# Altium PCB analog_osc.PcbDoc (part 1 of 2)
Units mm, origin at the board's own origin, x right, y up, seen from the top; angles counter-clockwise.
Board outline 145 x 85 mm, 4 copper layers (Top Layer, GND, Mid-Layer 1, Bottom Layer); 292 components, 196 nets, 993 pads, 506 vias.
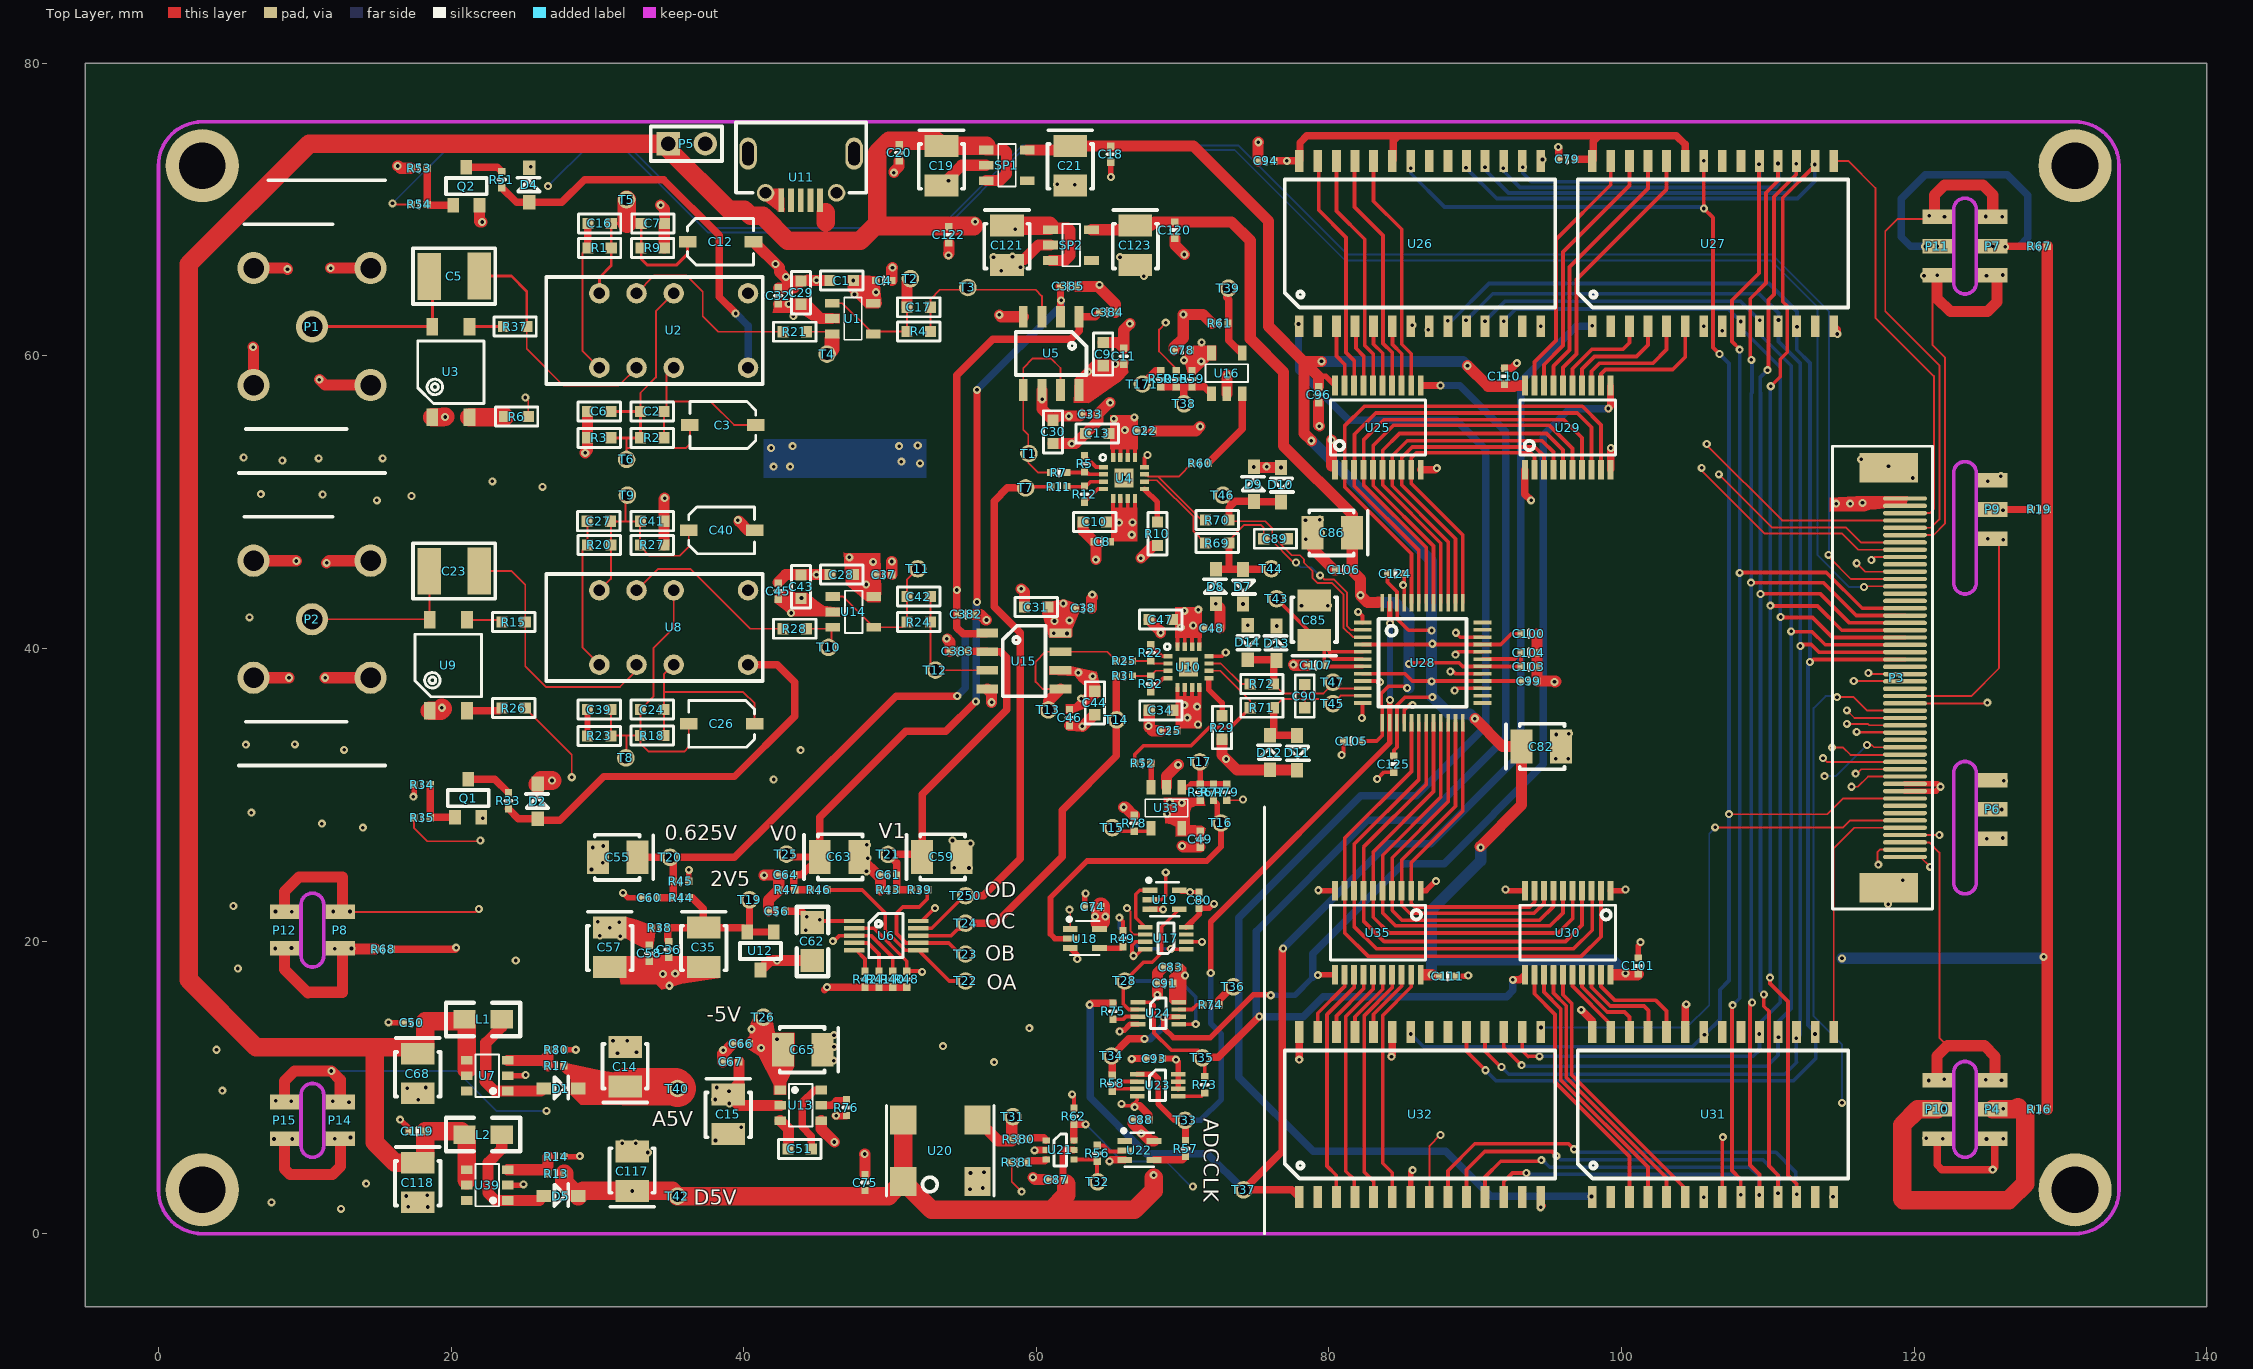
[diagram p0: Top Layer view]
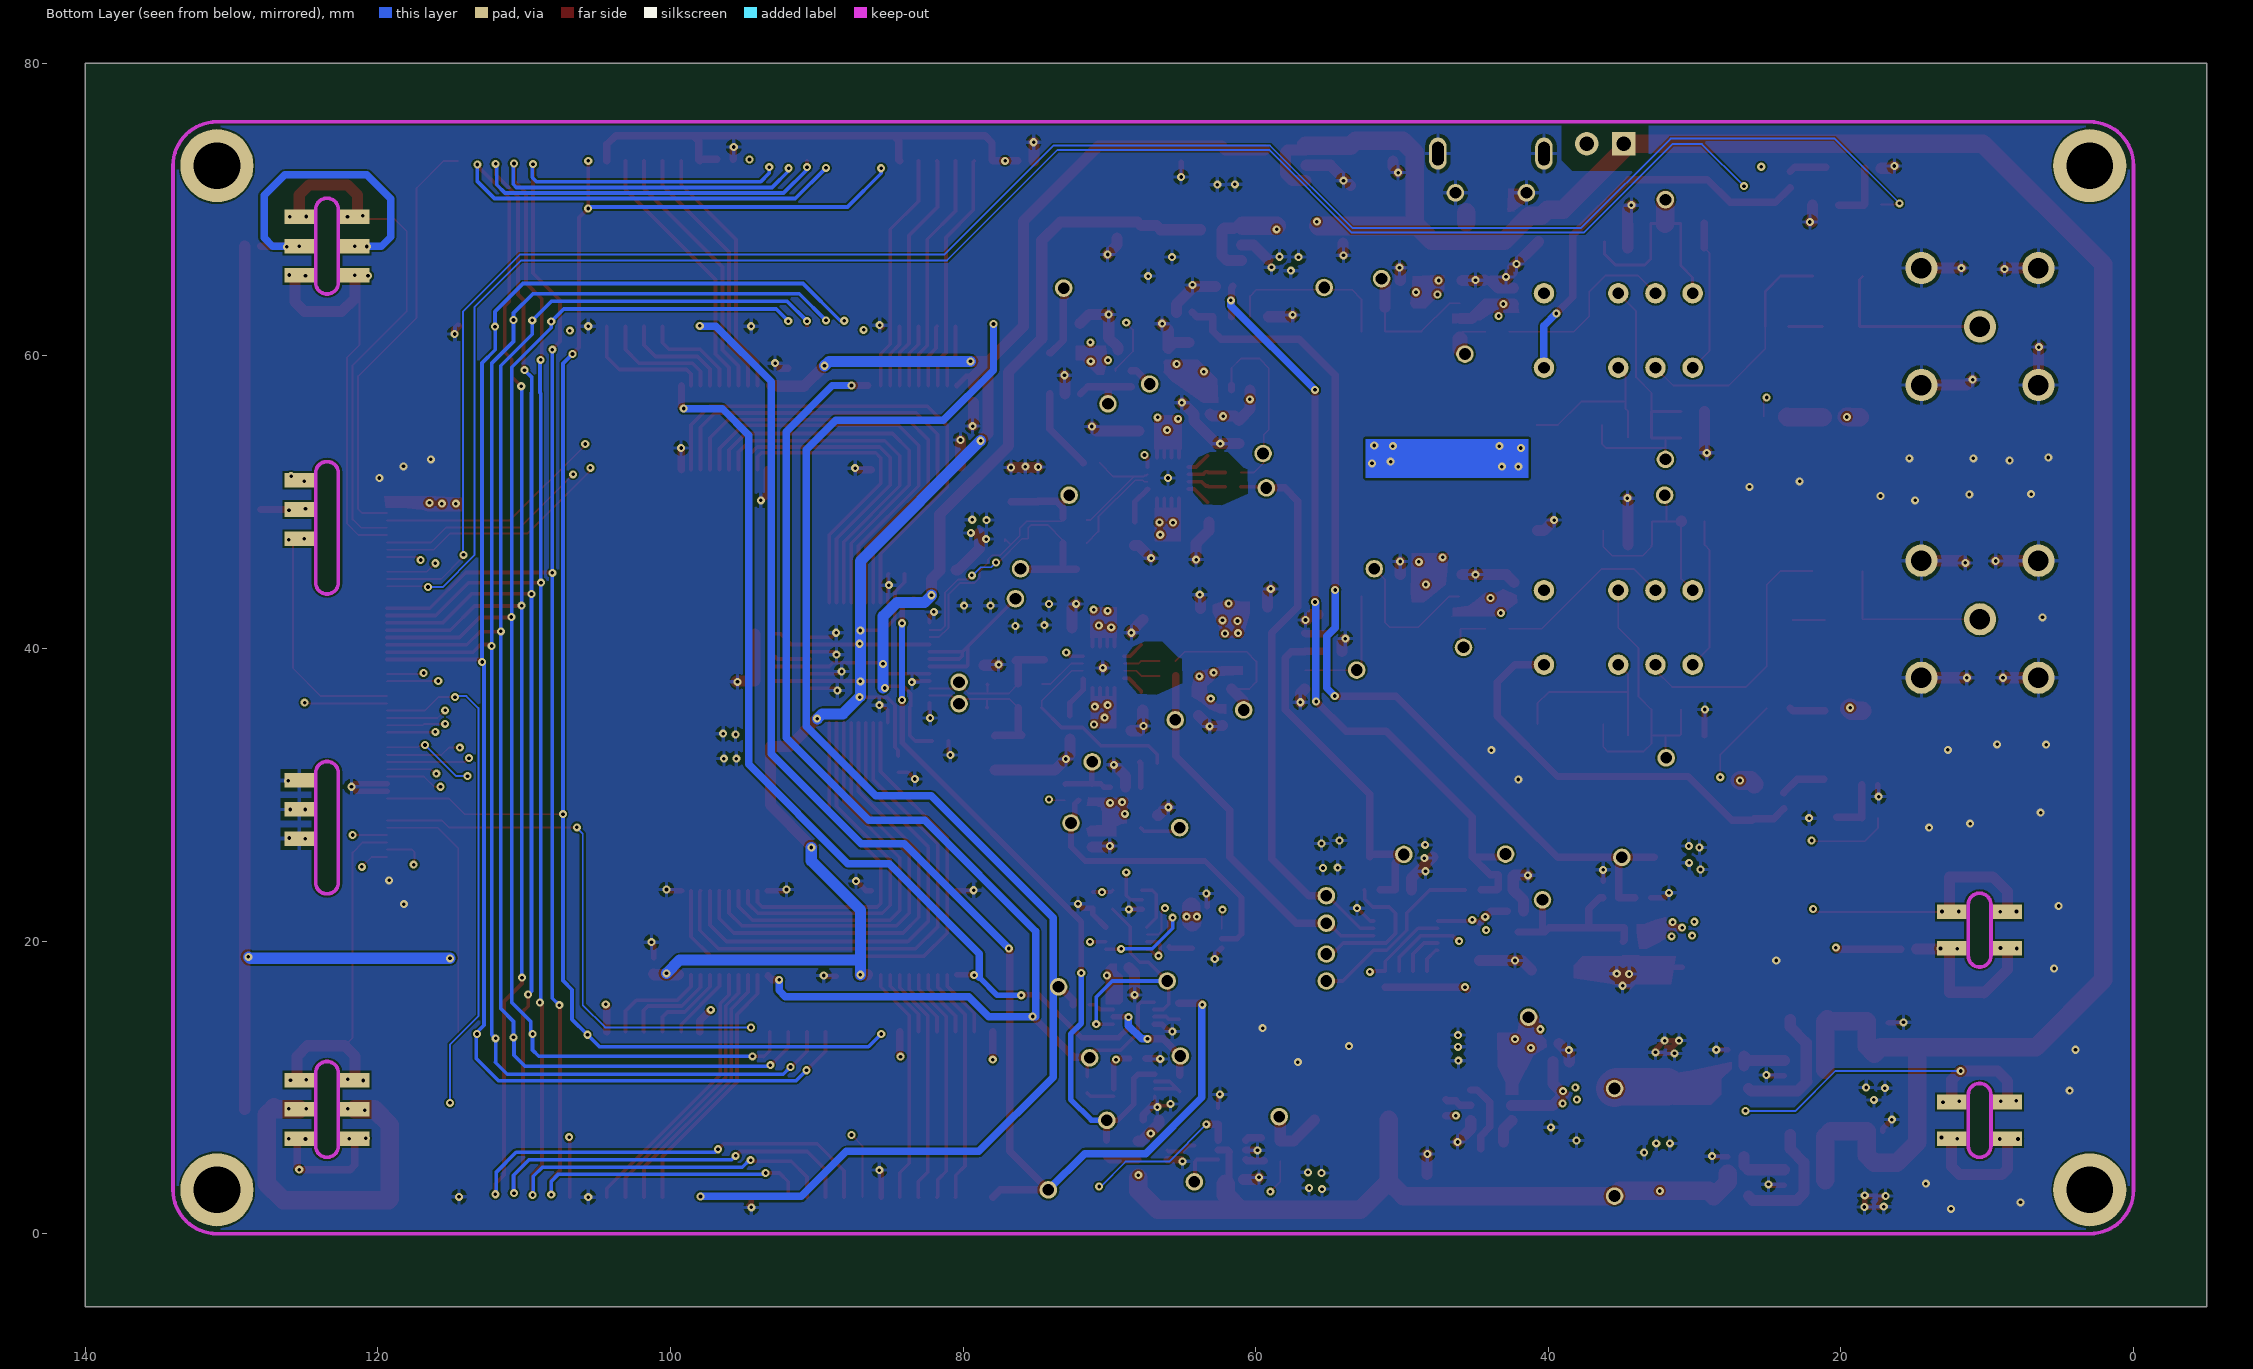
[diagram p1: Bottom Layer view, seen from below]
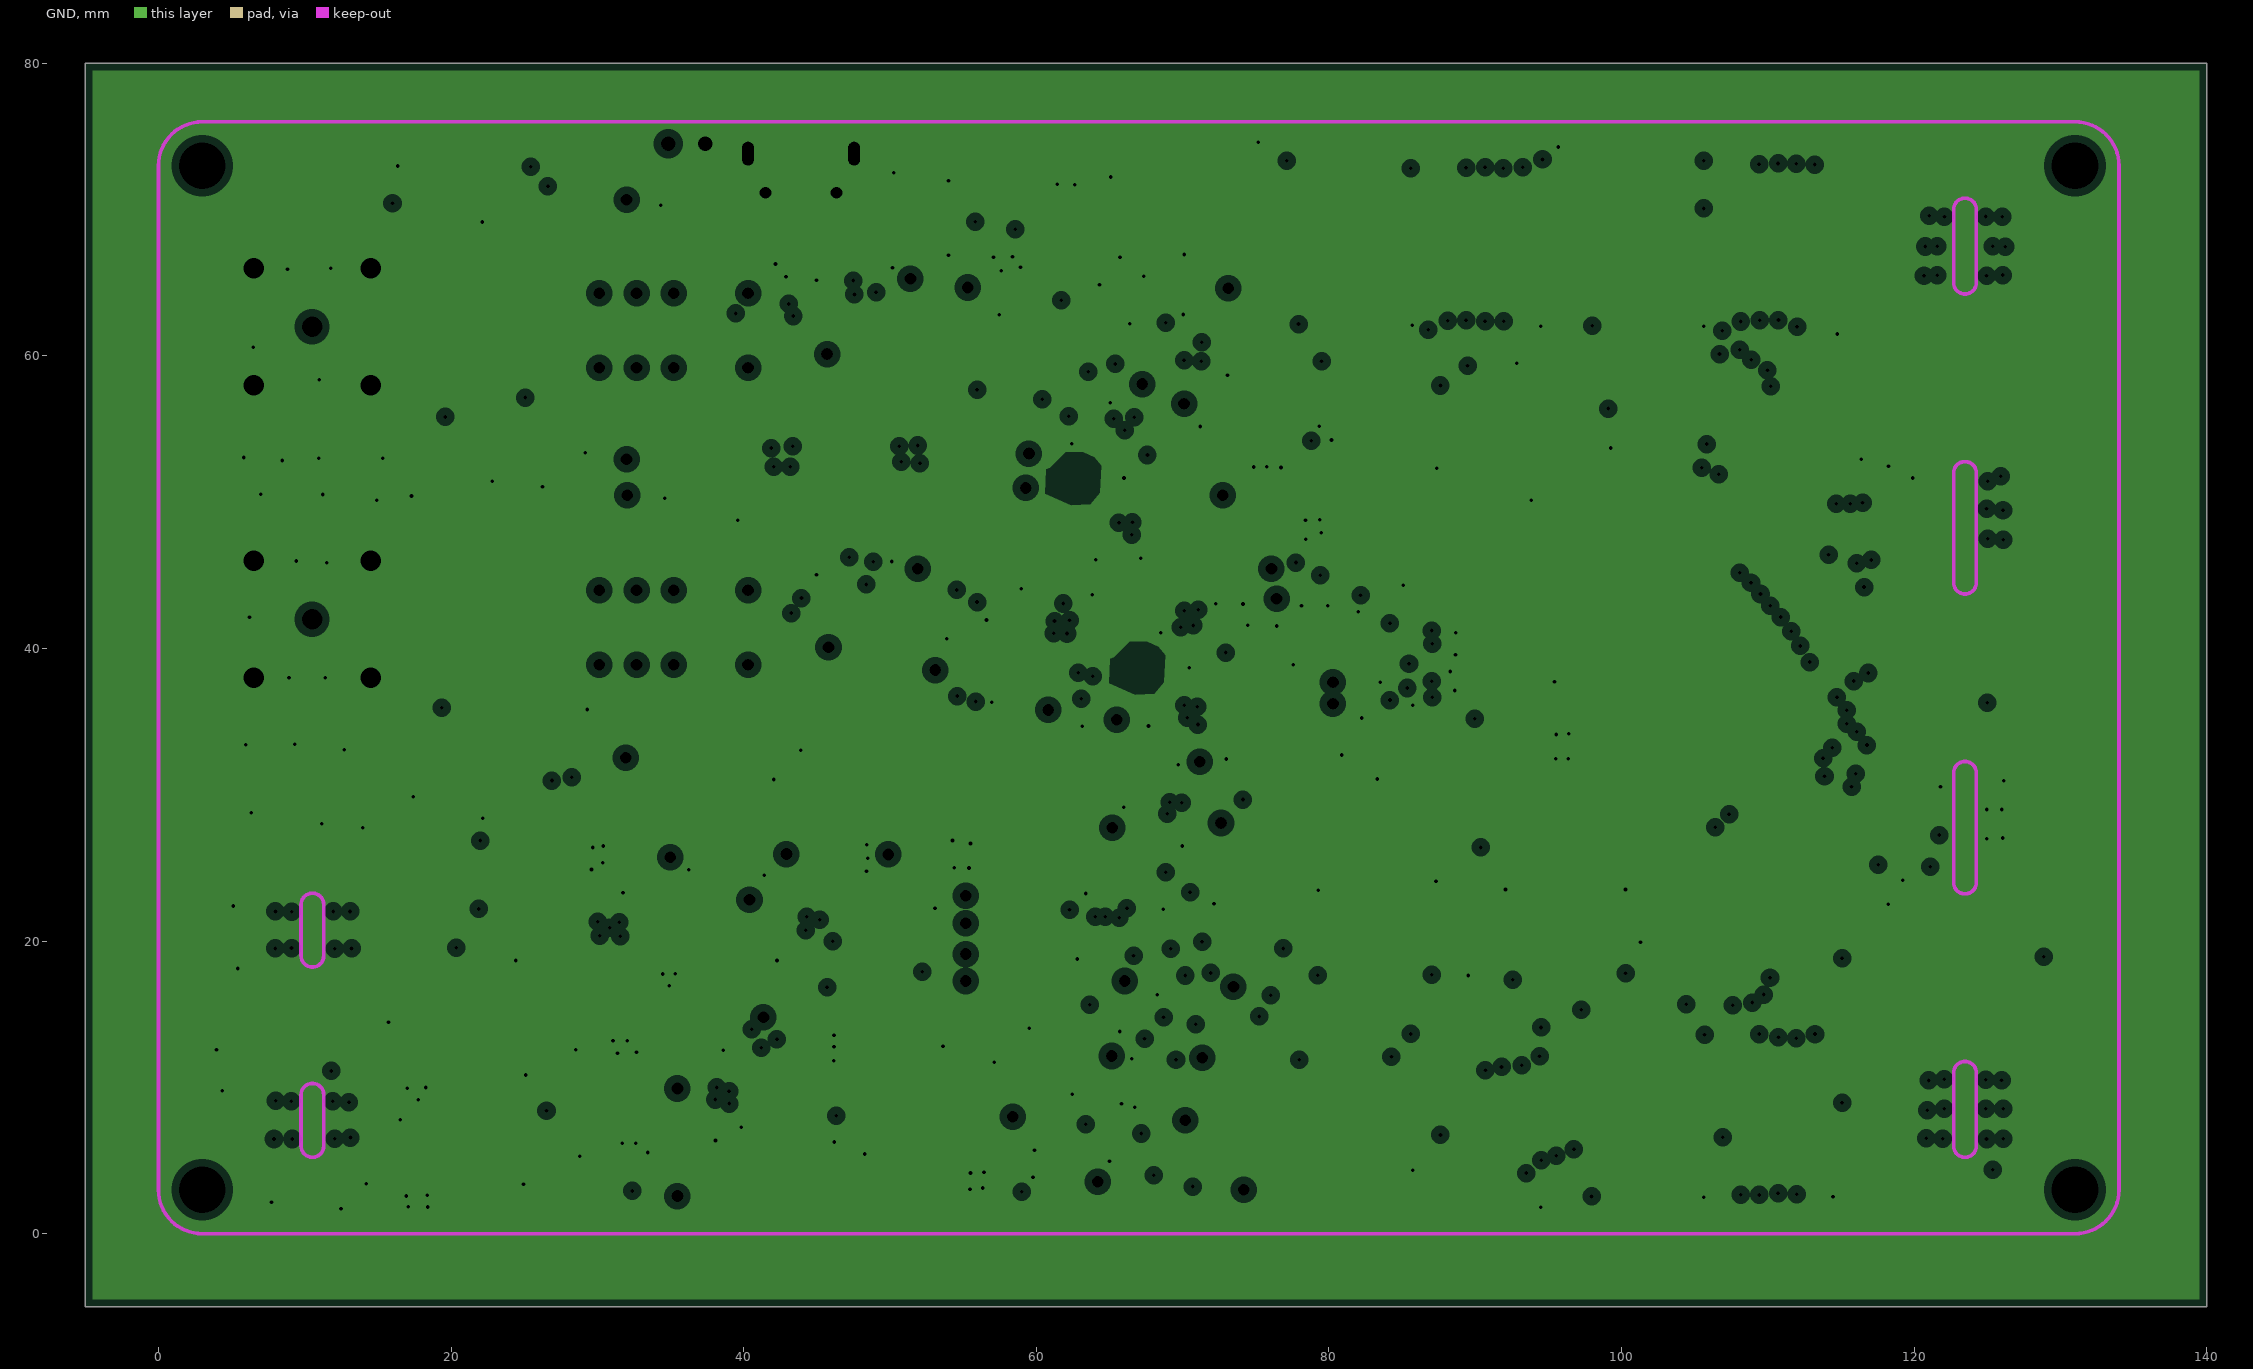
[diagram p2: GND, clearances drawn from the general rule]
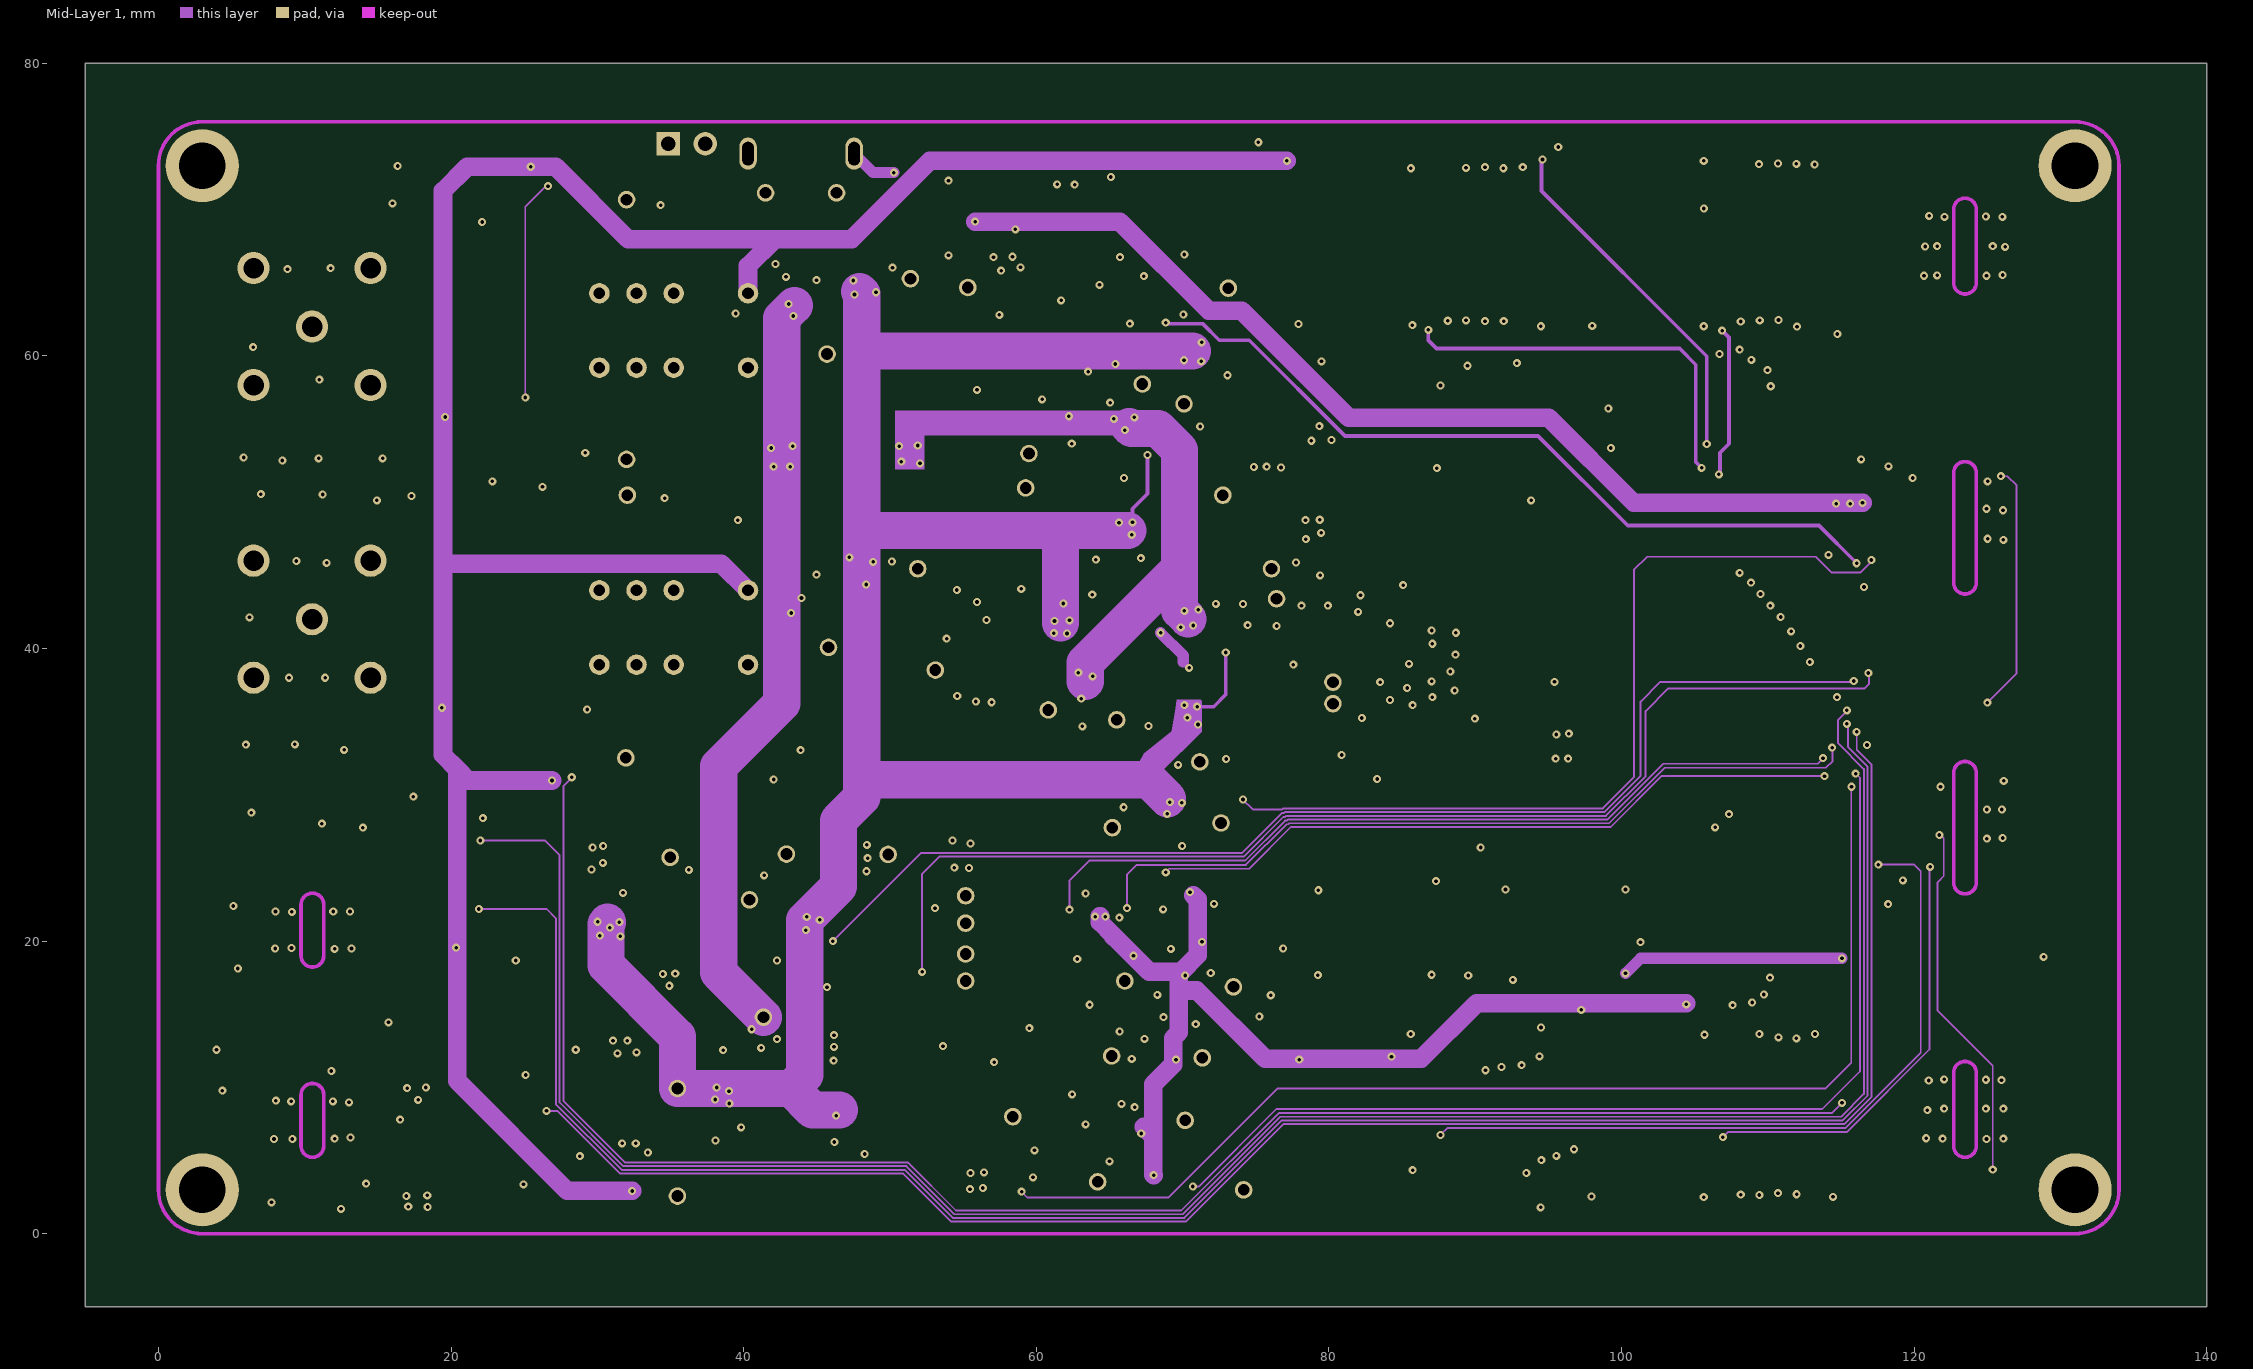
[diagram p3: Mid-Layer 1]

## Layer stack, top to bottom
Top Layer: signal copper 0.0356
Dielectric: core 0.32, FR-4, Dk 4.8
GND: plane copper 0.0356, net DGND
Dielectric: prepreg 0.32, FR-4, Dk 4.8
Mid-Layer 1: signal copper 0.0356
Dielectric: core 0.32, FR-4, Dk 4.8
Bottom Layer: signal copper 0.0356

## Board outline
-5,80 140,80 140,-5 -5,-5

## Design rules (kind name [scope] priority, off if disabled: settings)
Clearance [All] p1: gap=0.127
ComponentClearance [All] p1 off: gap=0.254 collisioncheckmode=3 verticalgap=0.254 showdistances=FALSE
Height [All] p1 off: minheight=0 maxheight=25.4 prefheight=12.7
HoleSize [All] p1: absolutevalues=TRUE maxlimit=6 minlimit=0.2 maxpercent=80.000 minpercent=20.000
HoleToHoleClearance [All] p1: gap=0.025 allowstackedmicrovias=TRUE
MinimumSolderMaskSliver [All] p1: minsoldermaskwidth=0.025
PlaneClearance [All] p1: clearance=0.508
PlaneConnect [All] p1: planeconnectstyle=Relief reliefexpansion=0.508 reliefentries=4 reliefconductorwidth=0.254 reliefairgap=0.254
PolygonConnect [All] p1: connectstyle=Relief reliefconductorwidth=0.254 reliefentries=4 polygonreliefangle="90 Angle" airgapwidth=0.254
RoutingVias [All] p1: holewidth=0.25 width=0.55 viastyle="Through Hole" minholewidth=0.25 minwidth=0.55 maxholewidth=8 maxwidth=6
SilkToSilkClearance [All] p1: silktosilkclearance=0
SilkToSolderMaskClearance [IsPad] p1: minsilkscreentomaskgap=0 clearancetoexposedcopper=TRUE
SolderMaskExpansion [All] p1: expansion=0.102
Width [All] p1: maxlimit=25.4 minlimit=0.127 preferedwidth=0.254 toplayer_prefwidth=0.127 bottomlayer_prefwidth=0.127 minimp=50.000000 maximp=50.000000 favimp=50.000000
19 further rules are at their usual default settings.

## Classes and differential pairs
component class digtal: C14 C15 C18 C19 C20 C21 C49 C50 C51 C65 C66 C67 C68 C74 C75 C78 C80 C83 C87 C88 C91 C93 C117 C118 C119 C120 C121 C122 C123 D1 D5 L1 L2 P3 P5 R13 R14 R17 R36 R49 R50 R52 R55 R56 R57 R58 R59 R60 R61 R62 R73 R74 R75 R76 R77 R78 R79 R80 R380 R381 SP1 SP2 T15 T16 T17 T26 T28 T31 T32 T33 T34 T35 T36 T37 T38 T39 T40 T42 T171 U7 U11 U13 U16 U17 U18 U19 U20 U21 U22 U23 U24 U33 U39
component class adc: C79 C82 C85 C86 C89 C90 C94 C96 C99 C100 C101 C103 C104 C105 C106 C107 C110 C111 C124 C125 D7 D8 D9 D10 D11 D12 D13 D14 P4 P6 P7 P8 P9 P10 P11 P12 P14 P15 R16 R19 R67 R68 R69 R70 R71 R72 T43 T44 T45 T46 T47 U25 U26 U27 U28 U29 U30 U31 U32 U35
component class analog_osc: C1 C2 C3 C4 C5 C6 C7 C8 C9 C10 C11 C12 C13 C16 C17 C22 C23 C24 C25 C26 C27 C28 C29 C30 C31 C32 C33 C34 C35 C36 C37 C38 C39 C40 C41 C42 C43 C44 C45 C46 C47 C48 C55 C56 C57 C58 C59 C60 C61 C62 C63 C64 C382 C383 C384 C385 D2 D4 P1 P2 Q1 Q2 R1 R2 R3 R4 R5 R6 R7 R9 R10 R11 R12 R15 R18 R20 R21 R22 R23 R24 R25 R26 R27 R28 R29 R31 R32 R33 R34 R35 R37 R38 R39 R40 R41 R42 R43 R44 R45 R46 R47 R48 R51 R53 R54 T1 T2 T3 T4 T5 T6 T7 T8 T9 T10 T11 T12 T13 T14 T19 T20 T21 T22 T23 T24 T25 T250 U1 U2 U3 U4 U5 U6 U8 U9 U10 U12 U14 U15

## Components (designator, comment, footprint, x,y, rotation, side; value= is the part's Value field where it differs from the comment)
C1 "22UF" 0603C 47.5,65.15 r180 top
C2 "15PF" 0603C 34.55,56.2 r180 top
C3 "V_CAP" V-CAP 36.325,53.675 r0 top
C4 "C104" 0402 49.025,65.15 r0 top
C5 "1UF" 1812 18.525,65.425 r0 top
C6 "360P" 0603C 30.925,56.2 r180 top
C7 "18P" 0603C 33,69.05 r0 top
C8 "C104" 0402 63.95,47.3 r0 top
C9 "22UF" 0603C 64.575,59.325 r90 top
C10 "22UF" 0603C 64.8,48.65 r180 top
C11 "C104" 0402 65.975,59.425 r90 top
C12 "V_CAP" V-CAP 40.675,69.4 r180 top
C13 "22UF" 0603C 63.375,54.7 r0 top
C14 "100UF" CAP-T-3630 31.9,10.05 r270 top
C15 "100UF" CAP-T-3630 38.95,9.525 r90 top
C16 "390PF" 0603C 29.35,69.05 r0 top
C17 "2PF" 0603C 51.175,63.325 r0 top
C18 "C104" 0402 65.1,74.325 r270 top
C19 "100UF" CAP-T-3630 53.525,74.35 r90 top
C20 "C104" 0402 50.625,74.425 r270 top
C21 "100UF" CAP-T-3630 62.325,74.35 r90 top
C22 "C104" 0402 67.975,54.875 r180 top
C23 "1UF" 1812 18.525,45.275 r0 top
C24 "15PF" 0603C 34.55,35.825 r180 top
C25 "C104" 0402 68.525,34.375 r0 top
C26 "V_CAP" V-CAP 36.25,33.25 r0 top
C27 "390PF" 0603C 29.3,48.7 r0 top
C28 "22UF" 0603C 47.5,45.05 r180 top
C29 "22UF" 0603C 43.925,65.125 r270 top
C30 "22UF" 0603C 61.15,54 r90 top
C31 "22UF" 0603C 60.8,42.825 r180 top
C32 "C104" 0402 42.375,63.55 r90 top
C33 "C104" 0402 63.125,56.025 r0 top
C34 "22UF" 0603C 69.325,35.775 r180 top
C35 "100UF" CAP-T-3630 37.275,20.925 r90 top
C36 "C0.1uF" 0402 34.875,19.975 r270 top
C37 "C104" 0402 49.025,45.05 r0 top
C38 "C104" 0402 62.675,42.75 r0 top
C39 "360P" 0603C 30.925,35.825 r180 top
C40 "V_CAP" V-CAP 40.75,49.675 r180 top
C41 "18P" 0603C 32.95,48.7 r0 top
C42 "2PF" 0603C 51.175,43.55 r0 top
C43 "22UF" 0603C 43.925,45.025 r270 top
C44 "22UF" 0603C 64,35.475 r90 top
C45 "C104" 0402 42.375,43.375 r90 top
C46 "C104" 0402 62.275,35.825 r270 top
C47 "22UF" 0603C 67.7,41.975 r0 top
C48 "C104" 0402 72.55,41.4 r180 top
C49 "C104" 0402 71.2,27.525 r270 top
C50 "C104" 0402 17.85,14.425 r180 top
C51 "3.3UF" 0603C 44.625,5.8 r180 top
C55 "100UF" CAP-T-3630 32.75,25.725 r0 top
C56 "C0.1uF" 0402 42.8,22.05 r180 top
C57 "100UF" CAP-T-3630 30.85,20.925 r90 top
C58 "C0.1uF" 0402 33.55,19.725 r270 top
C59 "100UF" CAP-T-3630 52.2,25.75 r180 top
C60 "C0.1uF" 0402 33,22.975 r0 top
C61 "C0.1uF" 0402 49.35,24.525 r0 top
C62 "47uF" 1206 44.7,21.275 r270 top
C63 "100UF" CAP-T-3630 45.2,25.75 r180 top
C64 "C0.1uF" 0402 42.325,24.525 r0 top
C65 "100UF" CAP-T-3630 45.4,12.575 r0 top
C66 "C104" 0402 40.375,13 r180 top
C67 "C104" 0402 39.675,11.75 r180 top
C68 "100UF" CAP-T-3630 17.725,12.3 r90 top
C74 "C104" 0402 64.4,22.35 r180 top
C75 "C104" 0402 48.3,2.95 r90 top
C78 "C104" 0402 70.525,60.4 r180 top
C79 "C104" 0402 96.825,73.425 r180 top
C80 "C104" 0402 71.125,23.35 r270 top
C82 "100UF" CAP-T-3630 93.175,33.3 r180 top
C83 "C104" 0402 69.75,18.2 r180 top
C85 "100UF" CAP-T-3630 79,40.575 r270 top
C86 "100UF" CAP-T-3630 81.575,47.9 r0 top
C87 "C104" 0402 61.925,3.7 r180 top
C88 "C104" 0402 66.6,7.775 r0 top
C89 "2PF" 0603C 75.55,47.5 r0 top
C90 "2PF" 0603C 78.35,35.95 r90 top
C91 "C104" 0402 69.325,17.125 r180 top
C93 "C104" 0402 68.625,11.975 r180 top
C94 "C104" 0402 76.25,73.325 r180 top
C96 "C104" 0402 79.3,57.9 r270 top
C99 "C104" 0402 93.125,37.775 r0 top
C100 "C104" 0402 93.125,41 r0 top
C101 "C104" 0402 101.15,17.75 r90 top
C103 "C104" 0402 93.125,38.742 r0 top
C104 "C104" 0402 93.125,39.708 r0 top
C105 "C104" 0402 82.1,33.675 r180 top
C106 "C104" 0402 81.575,45.375 r180 top
C107 "C104" 0402 79.675,38.85 r180 top
C110 "C104" 0402 92,58.05 r90 top
C111 "C104" 0402 87.575,17.6 r0 top
C117 "100UF" CAP-T-3630 32.375,2.925 r270 top
C118 "100UF" CAP-T-3630 17.725,4.85 r90 top
C119 "C104" 0402 18.25,7 r180 top
C120 "C104" 0402 69.475,69.15 r270 top
C121 "100UF" CAP-T-3630 58,68.9 r90 top
C122 "C104" 0402 54.025,68.825 r270 top
C123 "100UF" CAP-T-3630 66.775,68.9 r90 top
C124 "C104" 0402 84,45.1 r0 top
C125 "C104" 0402 84.425,32.65 r270 top
C382 "C104" 0402 55.75,42.325 r180 top
C383 "C104" 0402 54.1,39.8 r0 top
C384 "C104" 0402 65.425,62.975 r180 top
C385 "C104" 0402 62.75,64.75 r180 top
D1 "1N5918WS" SOD23-322F 26.325,9.95 r180 top
D2 "BAT54WS" LC-SOD-323F 25.925,28.375 r270 top
D4 "BAT54WS" LC-SOD-323F 25.35,70.5 r270 top
D5 "1N5918WS" SOD23-322F 26.325,2.6 r180 top
D7 "KDS4148U" LC-SOD-323F 74.125,45.4 r90 top
D8 "KDS4148U" LC-SOD-323F 72.275,43.05 r270 top
D9 "KDS4148U" LC-SOD-323F 74.875,50.05 r270 top
D10 "KDS4148U" LC-SOD-323F 76.725,52.375 r90 top
D11 "KDS4148U" LC-SOD-323F 77.825,34.05 r90 top
D12 "KDS4148U" LC-SOD-323F 75.975,31.7 r270 top
D13 "KDS4148U" LC-SOD-323F 76.425,39.175 r270 top
D14 "KDS4148U" LC-SOD-323F 74.45,41.6 r90 top
L1 "10uH" 0805 20.925,14.65 r0 top
L2 "10uH" 0805 20.925,6.775 r0 top
P1 "BNC" BNC-OSC 10.5,62 r0 top locked
P2 "BNC" BNC-OSC 10.5,42 r0 top locked
P3 "FPC50-0.5" FPC50-0.5 121,38 r180 top locked
P4 "Header 3" ROTA-3PIN 125.4,8.5 r0 top locked
P5 "Head2" HEAD2 37.375,74.5 r90 top
P6 "Header 3" ROTA-3PIN 125.4,29 r0 top locked
P7 "Header 3" ROTA-3PIN 125.4,67.5 r0 top locked
P8 "Header 2" ROTA-2PIN 12.425,22 r0 top locked
P9 "Header 3" ROTA-3PIN 125.4,49.5 r0 top
P10 "Header 3" ROTA-3PIN 121.6,8.5 r0 top locked
P11 "Header 3" ROTA-3PIN 121.6,67.5 r0 top locked
P12 "Header 2" ROTA-2PIN 8.625,22 r0 top locked
P14 "Header 2" ROTA-2PIN 12.425,9 r0 top locked
P15 "Header 2" ROTA-2PIN 8.625,9 r0 top locked
Q1 "SI2302" SOT-23-3 20.275,28.475 r0 top
Q2 "SI2302" SOT-23-3 20.15,70.3 r0 top
R1 "49.9K" 0603R 29.35,67.375 r0 top
R2 "953K" 0603R 34.55,54.4 r180 top
R3 "47K" 0603R 30.925,54.4 r180 top
R4 "100" 0603R 51.175,61.675 r0 top
R5 "499" 0402 63.3,52.075 r90 top
R6 "240R" 0603R 25.275,55.85 r180 top
R7 "499" 0402 61,52.025 r0 top
R9 "953K" 0603R 32.975,67.375 r0 top
R10 "0" 0603R 68.275,47.05 r90 top
R11 "499" 0402 61,51.05 r0 top
R12 "499" 0402 63.3,51.1 r270 top
R13 "732K" 0402 26.625,4.1 r0 top
R14 "10K" 0402 27.725,5.275 r180 top
R15 "56R" 0603R 23.475,41.8 r0 top
R16 "10K" 0402 129.1,8.5 r180 top
R17 "732K" 0402 26.625,11.475 r0 top
R18 "953K" 0603R 34.55,34.05 r180 top
R19 "10K" 0402 129.1,49.5 r180 top
R20 "49.9K" 0603R 29.325,47.075 r0 top
R21 "R100R" 0603R 42.7,61.65 r0 top
R22 "499" 0402 67.825,39.15 r90 top
R23 "47K" 0603R 30.925,34.025 r180 top
R24 "100" 0603R 51.175,41.8 r0 top
R25 "499" 0402 65.475,39.15 r0 top
R26 "240R" 0603R 25.075,35.925 r180 top
R27 "953K" 0603R 32.95,47.075 r0 top
R28 "R100R" 0603R 42.7,41.35 r0 top
R29 "0" 0603R 72.7,33.8 r90 top
R31 "499" 0402 65.475,38.125 r0 top
R32 "499" 0402 67.825,38.125 r270 top
R33 "R100R" 0402 23.925,30.15 r270 top
R34 "R10K" 0402 18.575,30.7 r180 top
R35 "R100R" 0402 18.575,28.425 r180 top
R36 "10K" 0402 71.2,29.625 r90 top
R37 "56R" 0603R 23.575,62 r0 top
R38 "R2K" 0402 33.7,20.9 r0 top
R39 "R2K" 0402 51.475,23.5 r0 top
R40 "R5K" 0402 50.2,16.85 r90 top
R41 "R5K" 0402 49.25,16.85 r90 top
R42 "R5K" 0402 48.3,16.85 r90 top
R43 "R4.99K" 0402 49.35,23.5 r0 top
R44 "R3K" 0402 35.175,22.975 r0 top
R45 "R1K" 0402 36.25,24.1 r180 top
R46 "R2K" 0402 44.575,23.5 r0 top
R47 "R4.99K" 0402 42.4,23.5 r0 top
R48 "R5K" 0402 51.15,17.95 r270 top
R49 "75" 0402 65.925,19.625 r90 top
R50 "75" 0402 68.5,57.875 r90 top
R51 "R100R" 0402 23.475,72.6 r270 top
R52 "10K" 0402 66.725,32.15 r0 top
R53 "R10K" 0402 18.375,72.825 r180 top
R54 "R100R" 0402 18.375,70.35 r180 top
R55 "75" 0402 69.575,57.875 r90 top
R56 "75" 0402 64.175,6.05 r270 top
R57 "75" 0402 70.2,6.375 r270 top
R58 "75" 0402 65.2,10.825 r270 top
R59 "10K" 0402 70.65,58.975 r270 top
R60 "10K" 0402 70.65,52.65 r0 top
R61 "10K" 0402 72,62.225 r0 top
R62 "10K" 0402 62.575,7.475 r90 top
R67 "10K" 0402 129.1,67.5 r180 top
R68 "10K" 0402 15.925,19.45 r180 top
R69 "100" 0603R 73.175,47.2 r180 top
R70 "100" 0603R 73.175,48.775 r180 top
R71 "100" 0603R 76.225,35.95 r180 top
R72 "100" 0603R 76.225,37.575 r180 top
R73 "75" 0402 71.525,10.725 r270 top
R74 "75" 0402 72.475,15.65 r180 top
R75 "75" 0402 65.25,14.65 r90 top
R76 "R10K" 0402 47.025,8.075 r90 top
R77 "75" 0402 72.112,30.725 r270 top
R78 "10K" 0402 66.7,28.6 r270 top
R79 "75" 0402 73.025,30.725 r270 top
R80 "10K" 0402 27.725,12.575 r180 top
R380 "75" 0402 59.35,6.45 r180 top
R381 "75" 0402 59.3,4.875 r180 top
SP1 "SP6201-3-0" SOT23-5 56.575,74.075 r270 top
SP2 "SP6201-3-0" SOT23-5 60.975,68.625 r270 top
T1 "TP" TEST_POINT 59.5,53.325 r270 top
T2 "TP" TEST_POINT 51.4,65.275 r0 top
T3 "TP" TEST_POINT 55.325,64.675 r0 top
T4 "TP" TEST_POINT 45.7,60.125 r90 top
T5 "TP" TEST_POINT 32,70.675 r0 top
T6 "TP" TEST_POINT 32,52.925 r0 top
T7 "TP" TEST_POINT 59.275,50.975 r0 top
T8 "TP" TEST_POINT 31.95,32.525 r90 top
T9 "TP" TEST_POINT 32.05,50.475 r0 top
T10 "TP" TEST_POINT 45.8,40.075 r90 top
T11 "TP" TEST_POINT 51.9,45.45 r0 top
T12 "TP" TEST_POINT 53.1,38.525 r90 top
T13 "TP" TEST_POINT 60.825,35.8 r90 top
T14 "TP" TEST_POINT 65.5,35.125 r90 top
T15 "TP" TEST_POINT 65.2,27.75 r90 top
T16 "TP" TEST_POINT 72.625,28.075 r90 top
T17 "TP" TEST_POINT 71.175,32.25 r90 top
T19 "TP" TEST_POINT 40.4,22.825 r90 top
T20 "TP" TEST_POINT 34.975,25.725 r90 top
T21 "TP" TEST_POINT 49.875,25.925 r90 top
T22 "TP" TEST_POINT 55.175,17.275 r90 top
T23 "TP" TEST_POINT 55.175,19.117 r90 top
T24 "TP" TEST_POINT 55.175,21.225 r90 top
T25 "TP" TEST_POINT 42.925,25.95 r90 top
T26 "TP" TEST_POINT 41.35,14.8 r90 top
T28 "TP" TEST_POINT 66.05,17.275 r90 top
T31 "TP" TEST_POINT 58.4,8 r90 top
T32 "TP" TEST_POINT 64.2,3.55 r90 top
T33 "TP" TEST_POINT 70.175,7.75 r270 top
T34 "TP" TEST_POINT 65.15,12.15 r270 top
T35 "TP" TEST_POINT 71.35,12.025 r270 top
T36 "TP" TEST_POINT 73.475,16.875 r270 top
T37 "TP" TEST_POINT 74.175,3 r270 top
T38 "TP" TEST_POINT 70.1,56.725 r90 top
T39 "TP" TEST_POINT 73.125,64.625 r90 top
T40 "TP" TEST_POINT 35.475,9.925 r90 top
T42 "TP" TEST_POINT 35.475,2.575 r90 top
T43 "TP" TEST_POINT 76.425,43.4 r90 top
T44 "TP" TEST_POINT 76.075,45.45 r90 top
T45 "TP" TEST_POINT 80.275,36.225 r90 top
T46 "TP" TEST_POINT 72.75,50.475 r90 top
T47 "TP" TEST_POINT 80.275,37.7 r90 top
T171 "TP" TEST_POINT 67.25,58.075 r90 top
T250 "TP" TEST_POINT 55.175,23.1 r90 top
U1 "AD8605" SOT23-5 46.05,63.6 r270 top
U2 "RELAY-8" RELAY-GS6-8 40.3,64.275 r180 top
U3 "AQY282SX" SOP4 18.725,55.8 r0 top
U4 "ADA4932-1" LFCSP-16 64.5,50.15 r0 top
U5 "AD603ARZ" SOP-8 62.925,62.675 r270 top
U6 "MCP4728-E/UN" MSOP10 47.55,21.375 r0 top
U7 "SY7152ABC" SOT23-6 23.875,9.75 r90 top
U8 "RELAY-8" RELAY-GS6-8 40.3,43.975 r180 top
U9 "AQY282SX" SOP4 18.55,35.75 r0 top
U10 "ADA4932-1" LFCSP-16 68.9,37.225 r0 top
U11 "MINI USB" Micro_USB_t 46.35,71.15 r90 top
U12 "TL431IDBZR" SOT-23-3 42.05,20.625 r180 top
U13 "SGM3204" SOT23-6 42.5,9.825 r270 top
U14 "AD8605" SOT23-5 46.1,43.55 r270 top
U15 "AD603ARZ" SOP-8 56.65,41.05 r0 top
U16 "AD8605" SOT23-5 71.975,57.4 r0 top
U17 "NL14SZ74" VFSOP-8 70.25,19.45 r180 top
U18 "NC7SZ86P5X" SC70-5 62.325,20.825 r0 top
U19 "MC74HC1G32DFT1G" SC70-5 67.775,23.475 r0 top
U20 "XTAL-100Mhz" 7050 50.9,3.575 r0 top
U21 "NLASB3157" SC-88 60.675,6.375 r270 top
U22 "NL17SZ14DFT2G" SC70-5 66.05,6.35 r0 top
U23 "NL14SZ74" VFSOP-8 66.9,10.9 r0 top
U24 "74LVC2G132" VFSOP-8 66.95,15.825 r0 top
U25 "74LVC574" TSSOP20 80.425,52.225 r0 top locked
U26 "IDT7204L12SO" SO28-3 77.975,62.025 r90 top locked
U27 "IDT7204L12SO" SO28-3 98,62.025 r90 top locked
U28 "AD9288BSTZ-100" LQFP48 82.3,43.375 r270 top locked
U29 "74LVC574" TSSOP20 93.4,52.225 r0 top locked
U30 "74LVC574" TSSOP20 99.25,23.45 r180 top locked
U31 "IDT7204L12SO" SO28-3 98,2.5 r90 top locked
U32 "IDT7204L12SO" SO28-3 77.975,2.5 r90 top locked
U33 "AD8605" SOT23-5 69.95,30.525 r180 top
U35 "74LVC574" TSSOP20 86.275,23.45 r180 top locked
U39 "SY7152ABC" SOT23-6 23.875,2.275 r90 top

## Footprints (in the part's own frame and the unit in brackets; to place one, negate y for a bottom-side part, rotate by r counter-clockwise, add the part's x,y. Pads: shape width x height; smd on the part's side, far side on the other; paste and mask are expansions set on the pad)
0402 [mm]
  rect 0.5x0.5 smd: 1(0,0) 2(1.1,0)
  silkscreen extent 0.55,-0.23 0.55,0.23
0603C [mil]
  rect 30x30 smd: 1(0,0) 2(62.99,0)
  silkscreen extent -26,-26 89,26
0603R [mil]
  rect 30x30 smd: 1(0,0) 2(62.99,0)
  silkscreen extent -26,-26 89,26
0805 [mil]
  rect 60x50 smd: 1(0,0) 2(100,0)
  silkscreen extent -50,-45 150,45
1206 [mm]
  rect 1.6x1.6 smd: 1(0,0) 2(2.6,0)
  silkscreen extent -1.07,-1.07 3.67,1.07
1812 [mm]
  rect 1.6x3.2 smd: 1(0,0) 2(3.4,0.025)
  silkscreen extent -1.12,-1.88 4.5,1.92
7050 [mm]
  rect 1.8x2 smd: 1(0,0) 2(5.08,0) 3(5.08,4.2) 4(0,4.2)
  silkscreen extent -1.14,-1 6.22,5.2
BNC-OSC [mm]
  round 2.2 hole 1.4: 1(0,0)
  round 2.2 hole 1.4 unplated: 2(-4,-4) 2(-4,4) 2(4,-4) 2(4,4)
  silkscreen extent -5,-10 5,10
CAP-T-3630 [mm]
  rect 1.5x2.3 smd: 1(0,0) 2(-2.7,0)
  silkscreen extent -2.93,-1.55 1.07,1.55
FPC50-0.5 [mm]
  rect 4x2 smd: 0(2.745,14.35) 0(2.745,-14.35)
  oval 3x0.3 smd: 1(1.625,12.25) 2(1.625,11.75) 3(1.625,11.25) 4(1.625,10.75) 5(1.625,10.25) 6(1.625,9.75) 7(1.625,9.25) 8(1.625,8.75) 9(1.625,8.25) 10(1.625,7.75) 11(1.625,7.25) 12(1.625,6.75) 13(1.625,6.25) 14(1.625,5.75) 15(1.625,5.25) 16(1.625,4.75) 17(1.625,4.25) 18(1.625,3.75) 19(1.625,3.25) 20(1.625,2.75) 21(1.625,2.25) 22(1.625,1.75) 23(1.625,1.25) 24(1.625,0.75) 25(1.625,0.25) 26(1.625,-0.25) 27(1.625,-0.75) 28(1.625,-1.25) 29(1.625,-1.75) 30(1.625,-2.25) 31(1.625,-2.75) 32(1.625,-3.25) 33(1.625,-3.75) 34(1.625,-4.25) 35(1.625,-4.75) 36(1.625,-5.25) 37(1.625,-5.75) 38(1.625,-6.25) 39(1.625,-6.75) 40(1.625,-7.25) 41(1.625,-7.75) 42(1.625,-8.25) 43(1.625,-8.75) 44(1.625,-9.25) 45(1.625,-9.75) 46(1.625,-10.25) 47(1.625,-10.75) 48(1.625,-11.25) 49(1.625,-11.75) 50(1.625,-12.25)
  silkscreen extent -0.25,-15.83 6.58,15.8
HEAD2 [mm]
  rect 1.6x1.6 hole 1: 1(0,2.54)
  round 1.6 hole 1: 2(0,0)
  silkscreen extent -1.17,-1.15 1.17,3.72
LC-SOD-323F [mm]
  rect 1x0.83 smd: 1(0,0) 2(-2.36,0)
  silkscreen extent -1.68,-0.82 -0.73,0.7, body extent -2.58,-0.7 0.22,0.65, height 0.75
LFCSP-16 [mm]
  rect 1.3x1.3 smd: 0(1.5,1.5)
  rect 0.6x0.3 smd: 1(0.1,2.25) 2(0.1,1.75) 3(0.1,1.25) 4(0.1,0.75) 9(2.9,0.75) 10(2.9,1.25) 11(2.9,1.75) 12(2.9,2.25)
  rect 0.3x0.6 smd: 5(0.75,0.1) 6(1.25,0.1) 7(1.75,0.1) 8(2.25,0.1) 13(2.25,2.9) 14(1.75,2.9) 15(1.25,2.9) 16(0.75,2.9)
  silkscreen extent -0.15,2.7 0.25,3.1
LQFP48 [mm]
  rect 0.25x1.2 smd: 1(1.6,0) 2(2.1,0) 3(2.6,0) 4(3.1,0) 5(3.6,0) 6(4.1,0) 7(4.6,0) 8(5.1,0) 9(5.6,0) 10(6.1,0) 11(6.6,0) 12(7.1,0) 25(7.1,8.2) 26(6.6,8.2) 27(6.1,8.2) 28(5.6,8.2) 29(5.1,8.2) 30(4.6,8.2) 31(4.1,8.2) 32(3.6,8.2) 33(3.1,8.2) 34(2.6,8.2) 35(2.1,8.2) 36(1.6,8.2)
  rect 1.2x0.25 smd: 13(8.45,1.35) 14(8.45,1.85) 15(8.45,2.35) 16(8.45,2.85) 17(8.45,3.35) 18(8.45,3.85) 19(8.45,4.35) 20(8.45,4.85) 21(8.45,5.35) 22(8.45,5.85) 23(8.45,6.35) 24(8.45,6.85) 37(0.25,6.85) 38(0.25,6.35) 39(0.25,5.85) 40(0.25,5.35) 41(0.25,4.85) 42(0.25,4.35) 43(0.25,3.85) 44(0.25,3.35) 45(0.25,2.85) 46(0.25,2.35) 47(0.25,1.85) 48(0.25,1.35)
  silkscreen extent 1.35,1.09 7.37,7.11
Micro_USB_t [mm]
  round 1.2 hole 0.8: 0(-0.005,4.85) 0(-0.005,0)
  oval 2.2x1.2 hole 0.8 slot 1.6 at 0 deg: 0(2.675,6.05) 0(2.675,-1.2)
  rect 1.6x0.4 smd: 1(-0.525,1.125) 2(-0.525,1.787) 3(-0.525,2.45) 4(-0.525,3.112) 5(-0.525,3.775)
  silkscreen extent 0,-2.02 4.8,6.88
MSOP10 [mm]
  rect 1.4x0.3 smd: 1(0,0) 2(0,-0.5) 3(0,-1) 4(0,-1.5) 5(0,-2) 6(4.4,-2) 7(4.4,-1.5) 8(4.4,-1) 9(4.4,-0.5) 10(4.4,0)
  silkscreen extent 1,-2.5 3.35,0.5
RELAY-GS6-8 [mm]
  round 1.4 hole 0.8: 1(0,0) 2(5.08,0) 3(7.62,0) 4(10.16,0) 5(10.16,5.08) 6(7.62,5.08) 7(5.08,5.08) 8(0,5.08)
  silkscreen extent -1,-1.11 13.8,6.19, body extent -1,-1.11 13.8,6.19, height 10.86
ROTA-2PIN [mm]
  rect 2x1 smd: 1(0,0) 2(0,-2.5)
  rect 2x1 smd far side: 1(0,0) 2(0,-2.5)
ROTA-3PIN [mm]
  rect 2x1 smd: 1(-0.025,2) 2(-0.025,0) 3(-0.025,-2)
  rect 2x1 smd far side: 1(-0.025,2) 2(-0.025,0) 3(-0.025,-2)
SC70-5 [mm]
  rect 1x0.4 smd: 1(0,0) 2(0,-0.65) 3(0,-1.3) 4(2,-1.3) 5(2,0)
  silkscreen extent -0.08,-1.78 2,0.67
SC-88 [mm]
  rect 0.4x0.5 smd: 1(0,0) 2(0.65,0) 3(1.3,0) 4(1.3,1.9) 5(0.65,1.9) 6(0,1.9)
  silkscreen extent -0.45,0.53 1.75,1.4
SO28-3 [mm]
  rect 1.5x0.6 smd: 1(0,0) 2(0,-1.27) 3(0,-2.54) 4(0,-3.81) 5(0,-5.08) 6(0,-6.35) 7(0,-7.62) 8(0,-8.89) 9(0,-10.16) 10(0,-11.43) 11(0,-12.7) 12(0,-13.97) 13(0,-15.24) 14(0,-16.51) 15(11.3,-16.51) 16(11.3,-15.24) 17(11.3,-13.97) 18(11.3,-12.7) 19(11.3,-11.43) 20(11.3,-10.16) 21(11.3,-8.89) 22(11.3,-7.62) 23(11.3,-6.35) 24(11.3,-5.08) 25(11.3,-3.81) 26(11.3,-2.54) 27(11.3,-1.27) 28(11.3,0)
  silkscreen extent 1.28,-17.5 10.02,1
SOD23-322F [mm]
  rect 1x0.83 smd: 1(0,0.025) 2(-2.36,0.025)
  silkscreen extent -1.68,-0.8 -0.73,0.72, body extent -2.58,-0.67 0.22,0.68, height 0.75
SOP4 [mm]
  rect 0.8x1.2 smd: 1(0,0) 2(2.54,0) 3(2.54,6.2) 4(0,6.2)
  silkscreen extent -1,0.95 3.54,5.23
SOP-8 [mm]
  rect 1.5x0.6 smd: 1(0,0) 2(0,-1.27) 3(0,-2.54) 4(0,-3.81) 5(5,-3.81) 6(5,-2.54) 7(5,-1.27) 8(5,0)
  silkscreen extent 1.05,-4.32 3.98,0.51
SOT23-5 [mm]
  rect 0.6x1 smd: 1(0,0) 2(1.05,0) 3(2.1,0) 4(2.1,2.8) 5(0,2.8)
  silkscreen extent -0.4,0.82 2.5,2.02
SOT23-6 [mm]
  rect 0.6x0.8 smd: 1(0,0) 2(1.05,0) 3(2.1,0) 4(2.1,2.8) 5(1.05,2.8) 6(0,2.8)
  silkscreen extent -0.4,0.6 2.5,2.2
SOT-23-3 [mm]
  rect 0.8x1 smd: 1(0,0) 2(1.8,0) 3(0.9,2.6)
  silkscreen extent -0.5,0.75 2.3,1.85
TEST_POINT [mm]
  round 1.2 hole 0.8: 1(0,0)
TSSOP20 [mm]
  rect 0.4x1.35 smd: 1(0,0) 2(0.65,0) 3(1.3,0) 4(1.95,0) 5(2.6,0) 6(3.25,0) 7(3.9,0) 8(4.55,0) 9(5.2,0) 10(5.85,0) 11(5.85,5.75) 12(5.2,5.75) 13(4.55,5.75) 14(3.9,5.75) 15(3.25,5.75) 16(2.6,5.75) 17(1.95,5.75) 18(1.3,5.75) 19(0.65,5.75) 20(0,5.75)
  silkscreen extent -0.33,1 6.17,4.75
V-CAP [mm]
  rect 1.2x0.8 smd: 1(0,1.6) 2(4.5,1.6)
  silkscreen extent 0,0 4.5,3.2
VFSOP-8 [mm]
  rect 1x0.3 smd: 1(0,0) 2(0,-0.5) 3(0,-1) 4(0,-1.5) 5(2.8,-1.5) 6(2.8,-1) 7(2.8,-0.5) 8(2.8,0)
  silkscreen extent 0.85,-1.8 1.92,0.3

## Part data
C1 C5 C9 C10 C13 C14 C15 C19 C21 C23 C28 C29 C30 C31 C34 C35 C43 C44 C47 C51 C55 C57 C59 C62 C63 C65 C68 C82 C85 C86 C89 C90 C117 C118 C121 C123: library part C10uF, "贴片电容"
C2 C4 C6 C7 C8 C11 C16 C17 C18 C20 C22 C24 C25 C27 C32 C33 C37 C38 C39 C41 C42 C45 C46 C48 C49 C50 C66 C67 C74 C75 C78 C79 C80 C83 C87 C88 C91 C93 C94 C96 C99 C100 C101 C103 C104 C105 C106 C107 C110 C111 C119 C120 C122 C124 C125 C382 C383 C384 C385: library part C0.1uF, "贴片电容"
C3 C12 C26 C40: library part "Cap Var", "Variable or Adjustable Capacitor"
D1 D2 D4 D5 D7 D8 D9 D10 D11 D12 D13 D14: library part Diode
L1 L2: library part Inductor-100uH
P1 P2: "BNC Elbow Connector"
P3: library part "Header 25X2", "Header, 25-Pin, Dual row"
P4 P6 P7 P9 P10 P11: "Header, 3-Pin"
P8 P12 P14 P15: "Header, 2-Pin"
Q1 Q2: library part MOSFET-N
R1 R2 R3 R4 R5 R6 R7 R9 R10 R11 R12 R13 R14 R15 R16 R17 R18 R19 R20 R22 R23 R24 R25 R26 R27 R29 R31 R32 R36 R37 R49 R50 R52 R55 R56 R57 R58 R59 R60 R61 R62 R67 R68 R69 R70 R71 R72 R73 R74 R75 R77 R78 R79 R80 R380 R381: library part R1M
R38 R39 R40 R41 R42 R43 R44 R45 R46 R47 R48: library part R10K
SP1 SP2: library part SP6201
U24: library part 74LVC2G132DCUR
U28: library part AD9288BST-100

## Free pads (board coordinates)
  round 5 hole 3.2: 0(3,3) 0(3,73) 0(131,3) 0(131,73)

## Via types
v1: diameter 0.55, hole 0.25, Top Layer to Bottom Layer, tented both sides, 501 vias
v2: diameter 0.55, hole 0.25, Top Layer to Bottom Layer, 5 vias

## Nets (pads, with @x,y where several pads share a name; then routed paths per layer and width w, separated by ;. In a path a pad name is that pad's centre, name@x,y a point inside that pad or via, vN(x,y) a via of type N, cw(c..) or ccw(c..) an arc to the next point about the centre after c; other vN are vias at no path point)
2V5: C35.1 C36.1 R38.2 R44.2 T19.1 U12.1 U12.2 | length 13.2
  Top Layer w0.508: C36.1@34.875,19.975 34.8,20.05 R38.2@34.8,20.9 37.25,20.9 37.25,22.225 36.5,22.975 R44.2@36.275,22.975 ; C35.1@37.275,20.925 39.95,20.925 U12.2@40.25,20.625 ; T19.1@40.4,22.825 40.4,20.775 U12.2@40.25,20.625 ; U12.1@42.05,20.625 U12.2@40.25,20.625
+5: C1.1 C4.1 C8.2 C9.1 C10.1 C11.1 C14.1 C15.1 C25.2 C28.1 C31.1 C34.1 C37.1 C38.1 C49.1 C56.1 C57.1 C58.1 C62.1 C67.1 C78.1 D1.2 R17.2 R36.1 R38.1 R40.1 R41.1 R42.1 R48.2 R59.1 R76.1 T40.1 U1.5 U4.5 U4.6 U4.7 U4.8 U4.12 U5.8 U6.1 U10.5 U10.6 U10.7 U10.8 U10.12 U13.2 U14.5 U15.8 U16.5 U33.5 | length 195.8
  Top Layer w0.254: C62.1@44.7,21.275 44.8,21.375 U6.1@47.55,21.375 ; 65.25,49.175 U4.5@65.25,50.25 ; 65.7,49.325 65.75,49.375 U4.6@65.75,50.25 ; 66.25,49.375 U4.7@66.25,50.25 ; 66.675,49.375 66.75,49.45 U4.8@66.75,50.25 ; U4.12@67.4,52.4 67.4,53.025 v1(67.6,53.225) ; U10.5@69.65,37.325 69.65,36.375 69.7,36.325 ; U10.6@70.15,37.325 70.15,36.6 70.2,36.55 ; 70.575,36.375 70.65,36.45 U10.7@70.65,37.325 ; v1@70.95,36.25 71.15,36.45 U10.8@71.15,37.325 ; U10.12@71.8,39.475 72.7,39.475 v1(72.95,39.725)
  Top Layer w0.508: v1(30.85,20.925) 30.875,20.9 R38.1@33.7,20.9 33.55,20.75 C58.1@33.55,19.725 ; C56.1@42.8,22.05 43.925,22.05 v1(44.312,21.662) C62.1@44.7,21.275 ; v1@45.525,16.675 v1(45.7,16.85) R42.1@48.3,16.85 R41.1@49.25,16.85 R40.1@50.2,16.85 R48.2@51.15,16.85 ; v1@46.275,8.075 R76.1@47.025,8.075
  Top Layer w0.762: C15.1@38.95,9.525 39.675,10.25 C67.1@39.675,11.75 ; C15.1@39.087,9.388 39.7,8.775 U13.2@42.5,8.775
  Top Layer w2.54: C14.1@31.9,10.05 35.35,10.05 T40.1@35.475,9.925
  Mid-Layer 1 w0.254: v1(66.575,48.625) 66.575,49.55 67.6,50.575 v1(67.6,53.225) ; v1(71,36.025) 72.125,36.025 72.95,36.85 v1(72.95,39.725)
  Mid-Layer 1 w2.54: 30.7,21.3 30.7,21.275 30.6,21.175 30.6,18.35 35.475,13.475 T40.1@35.475,9.925 43.25,9.925 ; 46.55,8.45 44.725,8.45 43.25,9.925 ; 47.925,64.4 48.075,64.25 48.075,48.075 ; 48.075,60.325 70.675,60.325 ; 61.65,41.75 61.65,48.075 ; 66.25,48.075 61.65,48.075 ; v1@68.975,29.725 67.675,31.025 48.075,31.025 ; 43.25,9.925 44.175,10.85 44.175,21.425 46.475,23.725 46.475,28.225 48.075,29.825 48.075,31.025 ; 48.075,31.025 48.075,48.075 ; 48.075,48.075 61.65,48.075
  other v1: 46.325,8.075 39.025,8.9 38.05,9.175 39,9.75 38.15,10 31.575,20.325 30.175,20.375 44.25,20.75 31.5,21.3 30.025,21.325 45.2,21.45 68.95,28.7 69.95,29.45 69.125,29.5 71.05,34.8 70.325,35.275 70.125,36.125 62.1,41.025 61.2,41.05 61.25,41.875 62.275,41.925 61.85,43.075 48.375,44.375 48.85,45.925 47.225,46.225 66.525,47.775 65.65,48.6 63.55,58.925 65.4,59.45 71.275,59.625 70.1,59.7 71.3,60.925 47.575,64.2 49.05,64.35 47.5,65.15
-5: C13.2 C22.2 C29.2 C30.2 C32.1 C33.1 C43.2 C44.2 C45.1 C46.1 C47.2 C48.2 C65.2 C66.1 T26.1 U1.2 U4.13 U4.14 U4.15 U4.16 U5.6 U10.13 U10.14 U10.15 U10.16 U13.1 U14.2 U15.6 | length 93
  Top Layer w0.254: U4.16@65.25,53.05 65.25,53.75 65.3,53.8 ; U4.15@65.75,53.05 65.75,53.8 65.775,53.825 ; U4.14@66.25,53.05 66.25,53.675 66.3,53.725 ; 66.675,53.825 66.75,53.75 U4.13@66.75,53.05 ; U10.16@69.65,40.125 69.65,40.875 ; U10.15@70.15,40.125 70.15,40.875 ; 70.6,40.875 70.65,40.825 U10.14@70.65,40.125 ; 71.1,40.85 71.15,40.8 U10.13@71.15,40.125
  Top Layer w0.762: C32.1@42.375,63.55 44.225,63.55 45.225,62.55 U1.2@46.05,62.55 ; U5.6@60.385,57.675 60.385,56.365 C30.2@61.15,55.6 61.45,55.9 63,55.9 C33.1@63.125,56.025
  Mid-Layer 1 w2.54: T26.1@41.35,14.8 38.3,17.85 38.3,31.95 42.6,36.25 42.6,62.575 43.475,63.45 ; 63.35,37.753 63.35,39.025 69.8,45.475 ; 66.35,55.175 66.5,55.025 68.325,55.025 69.8,53.55 69.8,45.475 ; 70.375,42.025 69.8,42.6 69.8,45.475
  other v1: 41.2,12.7 42.275,13.3 40.55,13.975 63.075,36.575 63.85,38.1 62.875,38.35 69.875,41.45 70.725,41.575 43.25,42.425 70.125,42.575 71.075,42.65 43.95,43.45 42.05,52.425 43.175,52.425 52.05,52.65 50.775,52.775 41.875,53.7 43.35,53.825 50.625,53.825 51.9,53.875 66.05,54.925 65.3,55.7 66.7,55.8 62.225,55.875 60.4,57.025 43.4,62.725 43.075,63.55
A3V: C86.1 C103.1 C104.1 C105.1 C106.1 C120.1 C123.1 SP2.5 U28.13 U28.30 U28.31 U28.48 | length 67.3
  Top Layer w0.254: C105.1@82.1,33.675 83.175,33.675 ; 83.275,33.675 83.65,34.05 U28.13@83.65,34.925 83.65,36 83.575,36.075 83.575,36.925 84.075,37.425 85.225,37.425 v1(85.35,37.3) ; v1(85.475,38.95) 85.55,39.025 88.9,39.025 89.15,38.775 U28.30@90.5,38.775 93.092,38.775 C103.1@93.125,38.742 C104.1@93.125,39.708 92.692,39.275 U28.31@90.5,39.275
  Top Layer w0.762: SP2.5@63.775,68.625 66.5,68.625 C123.1@66.775,68.9 67.85,68.9 68.1,69.15 C120.1@69.475,69.15 73.35,69.15 74.625,67.875 74.625,61.175 76.9,58.9 76.9,53.85 81.6,49.15 81.6,45.425 C106.1@81.65,45.375 ; C106.1@81.575,45.375 81.575,45.325 82.163,44.738 v1(82.163,43.637) 82.65,43.15 83.35,43.15 83.375,43.175
  Bottom Layer w0.762: v1(82.163,43.637) 82.65,43.15 84.525,43.15 85.475,42.2 v1(85.475,38.95) v1@85.475,37.3
AINA-T: C89.1 D7.1 D8.2 R69.1 T44.1 U28.2 | length 20
  Top Layer w0.127: R69.1@73.175,47.2 73.175,47.4 74.221,48.446 75.354,48.446 75.55,48.25 C89.1@75.55,47.5 75.975,47.5 77.6,45.875 v1(77.75,45.875) ; v1(79.4,45) 79.675,44.725 80.334,44.725 81.25,43.809 81.25,41.534 81.509,41.275 U28.2@82.3,41.275
  Top Layer w0.508: D8.2@72.275,45.41 73.125,45.41 ; R69.1@73.175,47.2 73.175,45.46 73.125,45.41 ; T44.1@76.075,45.45 76.035,45.41 73.125,45.41
  Bottom Layer w0.127: v1(77.75,45.875) 78.075,45.55 78.8,45.55 v1@79.3,45.05
AINN-T: C89.2 D9.1 D10.2 R70.1 T46.1 U28.3 | length 20.6
  Top Layer w0.127: R70.1@73.25,48.7 75.65,48.7 76.125,48.225 76.125,47.709 76.717,47.117 ; C89.2@77.15,47.325 C89.2@77.15,47.5 76.767,47.117 76.717,47.117 ; U28.3@82.3,40.775 81.65,40.775 80.996,41.429 80.996,43.704 80.229,44.471 79.229,44.471 78.875,44.825 78.875,45.3 78.3,45.875 78.3,46.1 78.025,46.375 77.459,46.375 76.717,47.117
  Top Layer w0.254: T46.1@72.75,50.475 73.175,50.05 73.175,49.625
  Top Layer w0.508: R70.1@73.175,48.925 73.175,49.625 73.6,50.05 D9.1@74.875,50.05 74.91,50.015 D10.2@76.725,50.015
BINA-T: C90.1 D11.1 D12.2 R71.1 T45.1 U28.11 | length 11.1
  Top Layer w0.127: R71.1@76.225,35.95 76.819,36.544 78.375,36.544 ; C90.1@78.375,35.975 78.375,36.544 ; T45.1@80.138,36.363 79.956,36.544 78.375,36.544 ; T45.1@80.513,36.488 80.8,36.775 U28.11@82.3,36.775
  Top Layer w0.254: C90.1@78.35,35.95 C90.1@78.375,35.975 ; T45.1@80.138,36.363 80.263,36.238 T45.1@80.513,36.488
  Top Layer w0.508: R71.1@76.225,35.95 76.225,34.31 D12.2@75.975,34.06 77.815,34.06 D11.1@77.825,34.05
BINN-T: C90.2 D13.1 D14.2 R72.1 T47.1 U28.10 | length 11.1
  Top Layer w0.127: R72.1@76.225,37.575 76.875,36.925 78.325,36.925 ; C90.2@78.325,37.525 78.325,36.925 ; T47.1@80.125,37.425 79.625,36.925 78.325,36.925 ; T47.1@80.275,37.575 80.575,37.275 U28.10@82.3,37.275
  Top Layer w0.254: C90.2@78.325,37.525 C90.2@78.35,37.55 ; T47.1@80.125,37.425 T47.1@80.275,37.575
  Top Layer w0.508: D14.2@74.45,39.24 76.36,39.24 D13.1@76.425,39.175 76.225,38.975 R72.1@76.225,37.575
D3V: C18.1 C21.1 C82.1 C96.1 C99.1 C100.1 C101.1 C110.1 C111.1 C124.1 C125.1 R16.1 R19.1 R67.1 SP1.5 U25.20 U28.4 U28.8 U28.15 U28.28 U28.33 U28.46 U29.20 U30.20 U35.20 | length 238.9
  Top Layer w0.254: U28.8@82.3,38.275 85.2,38.275 85.7,37.775 U28.28@90.5,37.775 C99.1@93.125,37.775 ; U28.4@82.3,40.275 U28.33@90.5,40.275 91.75,40.275 92.475,41 C100.1@93.125,41 ; C124.1@84,45.1 84,44.525 84.65,43.875 U28.46@84.65,43.125 84.675,43.1 84.675,42.025 85.45,41.25 86.975,41.25 87.025,41.2 v1(87.025,41.225) ; C125.1@84.425,32.65 84.45,32.675 84.45,33.05 84.65,33.25 U28.15@84.65,34.925 84.65,36.125 85.2,36.675 v1(87.075,36.675)
  Top Layer w0.381: 79.3,58.6 79.8,58.6 U25.20@80.425,57.975
  Top Layer w0.762: SP1.5@59.375,74.075 62.05,74.075 C21.1@62.325,74.35 70.75,74.35 75.875,69.225 75.875,62.025 78.275,59.625 ; v1(78.8,54.2) 78.289,54.711 78.289,59.611 ; C96.1@79.3,57.9 79.3,58.6 78.289,59.611 ; v1(79.5,59.625) 78.275,59.625 ; 86.525,17.7 v1(87.025,17.7) v1@87.05,17.7 ; v1(89.475,59.325) 90.875,57.925 92.65,57.925 92.7,57.975 93.075,57.975 ; v1(89.975,35.2) 91.875,33.3 C82.1@93.175,33.3 93.175,29.3 v1@90.35,26.475 ; 99.45,17.725 99.475,17.7 101.1,17.7 C101.1@101.15,17.75 ; R16.1@129.1,8.5 R19.1@129.1,49.5 R67.1@129.1,67.5 ; 78.275,59.625 78.289,59.611
  Mid-Layer 1 w0.762: v1(100.275,17.8) 101.3,18.825 v1(115.075,18.825)
  Bottom Layer w0.762: v1(78.8,54.2) 87.025,45.975 v1(87.025,41.225) v1(87.025,37.75) 87.025,36.725 v1(87.075,36.675) 88.231,35.519 89.644,35.519 v1@89.963,35.2 ; v1(79.5,59.625) 89.175,59.625 v1(89.475,59.325) ; v1(87.025,17.7) 87.025,18.7 ; v1(90.375,26.4) 90.375,25.475 87.025,22.125 87.025,18.7 ; v1(100.275,17.8) 99.375,18.7 87.025,18.7 ; v1(115.075,18.825) 128.75,18.825 v1(128.85,18.925)
  other v1: 87.075,40.325
D5V: C74.1 C75.1 C79.1 C80.1 C83.1 C87.1 C88.1 C91.1 C93.1 C94.1 C117.1 D2.2 D4.2 D5.2 R13.2 R68.1 T42.1 U2.1 U3.1 U8.1 U9.1 U17.2 U17.7 U17.8 U18.5 U19.5 U20.1 U20.4 U21.5 U22.5 U23.6 U23.7 U23.8 U24.8 U26.23 U26.28 U27.23 U27.28 U31.23 U31.28 U32.23 U32.28 | length 354.6
  Top Layer w0.254: U17.8@67.45,19.45 67.25,19.45 66.725,18.925 66.725,18.9 66.625,18.8 66.55,18.875 66.55,19.725 66.775,19.95 U17.7@67.45,19.95 ; U19.5@69.775,23.475 69.9,23.35 v1(70.513,23.35) C80.1@71.125,23.35 ; U17.2@70.25,19.95 71.3,19.95 71.325,19.975 71.328,19.972 v1(71.328,19.951)
  Top Layer w0.381: C93.1@68.625,11.975 69.45,11.975 v1@69.612,11.813 ; v1(69.55,11.9) 69.7,11.75 U23.8@69.7,10.9 U23.7@69.7,10.4 U23.6@69.7,9.9
  Top Layer w0.508: R68.1@15.925,19.45 20.3,19.45 v1@20.375,19.525 ; C87.1@61.925,3.7 61.825,3.8 61.825,5.575 61.8,5.6 61.925,5.725 U21.5@62.575,5.725 ; C94.1@76.25,73.325 v1(77.125,73.325) U26.28@77.975,73.325 78.025,73.375 78.025,74.575 78.5,75.05 84.75,75.05 ; v1(77.975,11.9) U32.28@77.975,13.8 ; v1(84.275,12.1) 84.275,12.15 84.325,12.2 U32.23@84.325,13.8 ; U26.23@84.325,73.325 84.4,73.4 84.4,74.7 84.75,75.05 ; C79.1@96.825,73.425 97.9,73.425 U27.28@98,73.325 98.075,73.4 98.075,74.675 98.45,75.05 ; v1(97.25,15.3) 98,14.55 U31.28@98,13.8 ; U31.23@104.35,13.8 104.35,15.575 104.425,15.65 v1(104.425,15.675) ; U27.23@104.35,73.325 104.35,74.45 103.75,75.05 98.45,75.05 ; 84.75,75.05 98.45,75.05
  Top Layer w0.762: C88.1@66.6,7.775 66.6,7.55 67.8,6.35 U22.5@68.05,6.35
  Top Layer w1.27: U9.1@18.55,35.75 19.3,35.75 19.425,35.875 19.425,35.9 v1(19.375,35.95) ; U3.1@18.725,55.8 19.425,55.8 19.45,55.825 v1(19.6,55.825) ; D2.2@25.925,30.735 26.165,30.975 v1(26.9,30.975) ; R13.2@27.725,4.1 27.725,3.535 D5.2@28.685,2.575 29.035,2.925 v1(32.375,2.925) 35.125,2.925 T42.1@35.475,2.575 49.9,2.575 U20.1@50.9,3.575 ; U20.4@50.9,7.775 U20.1@50.9,3.575 ; 62.05,3.4 62.05,2.675 61,1.625 ; 64.35,21.3 64.4,21.35 C74.1@64.4,22.35 ; v1@68.025,3.825 68.025,2.95 66.7,1.625 61,1.625 ; U20.1@50.9,3.575 52.85,1.625 61,1.625
  Mid-Layer 1 w1.27: v1(26.9,30.975) 21.2,30.975 20.425,31.75 ; v1(32.375,2.925) 27.95,2.925 20.425,10.45 20.425,31.75 ; U8.1@40.3,43.975 38.475,45.8 19.475,45.8 19.45,45.775 ; U2.1@40.3,64.275 40.3,66.15 42.125,67.975 ; 64.35,21.7 64.375,21.7 64.35,21.675 64.35,21.3 65.25,20.4 65.25,20.3 65.325,20.3 67.713,17.912 69.912,17.912 71.025,19.025 71.025,22.85 70.737,23.138 ; 67.35,7.3 68,6.65 ; v1(68.025,4) 68,4.025 68,6.65 ; 69.737,17.65 69.737,16.625 ; v1(77.125,73.325) 52.725,73.325 47.375,67.975 42.125,67.975 ; v1@104.425,15.75 90.1,15.75 86.3,11.95 75.65,11.95 70.975,16.625 69.737,16.625 ; 19.45,45.775 19.45,71.275 21.1,72.925 v1(25.45,72.925) 27.15,72.925 32.1,67.975 42.125,67.975 ; 19.45,45.775 19.45,32.725 20.425,31.75 ; 68,6.65 68,10.225 69.325,11.55 69.35,11.55 69.35,13.375 69.737,13.762 69.737,16.625
  other v1: 67.175,6.85 70.175,17.65 66.65,19 20.35,19.55 64.025,21.675 64.725,21.675
DGND: C1.2 C4.2 C6.2 C7.2 C8.1 C9.2 C10.2 C11.2 C12.1 C13.1 C14.2 C15.2 C18.2 C19.2 C20.2 C21.2 C22.1 C25.1 C28.2 C29.1 C30.1 C31.2 C32.2 C33.2 C34.2 C35.2 C36.2 C37.2 C38.2 C39.2 C40.1 C41.2 C43.1 C44.1 C45.2 C46.2 C47.1 C48.1 C49.2 C50.2 C55.2 C56.2 C57.2 C58.2 C59.2 C60.1 C61.1 C62.2 C63.2 C64.1 C65.1 C66.2 C67.2 C68.2 C74.2 C75.2 C78.2 C79.2 C80.2 C82.2 C83.2 C85.2 C86.2 C87.2 C88.2 C91.2 C93.2 C94.2 C96.2 C99.2 C100.2 C101.2 C103.2 C104.2 C105.2 C106.2 C107.2 C110.2 C111.2 C117.2 C118.2 C119.2 C120.2 C121.2 C122.2 C123.2 C124.2 C125.2 C382.1 C383.1 C384.1 C385.1 D7.2 D8.1 D9.2 D10.1 D11.2 D12.1 D13.2 D14.1 P1.2 P2.2 P3.0 P3.10 P3.11 P5.2 P6.1 P6.2 P6.3 Q1.2 Q2.2 R3.2 R9.2 R10.1 R14.1 R23.2 R27.2 R29.1 R34.2 R43.1 R45.1 R47.1 R53.2 R61.1 R62.2 R78.1 R80.1 SP1.2 SP2.2 U4.0 U5.4 U6.10 U7.2 U10.0 U11.0 U11.5 U12.3 U13.4 U15.4 U16.2 U17.4 U18.3 U19.3 U20.2 U21.2 U22.3 U23.4 U24.4 U25.1 U25.10 U26.7 U26.14 U27.7 U27.14 U28.1 U28.9 U28.12 U28.16 U28.27 U28.29 U28.32 U28.34 U28.45 U29.1 U29.10 U30.1 U30.10 U31.7 U31.14 U32.7 U32.14 U33.2 U35.1 U35.10 U39.2 | length 231.5
  Top Layer w0.254: U6.10@51.95,21.375 52.175,21.375 v1@53.062,22.263 ; v1(62.45,9.525) 62.575,9.4 R62.2@62.575,8.575 ; v1(65.825,8.875) 65.95,8.75 66.525,8.75 66.9,9.125 U23.4@66.9,9.4 ; v1(80.875,32.725) 81,32.85 C105.2@81,33.675 ; v1(82,42.5) 82,42.525 82.3,42.225 U28.1@82.3,41.775 ; v1(82.25,35.25) 82.225,35.275 82.3,35.35 U28.12@82.3,36.275 ; U28.9@82.3,37.775 v1@83.352,37.775 ; v1(83.3,31.075) 83.775,31.55 C125.2@84.425,31.55 ; v1@83.323,37.746 v1@83.352,37.775 ; C124.2@85.1,45.1 85.15,45.05 U28.45@85.15,43.125 ; U28.16@85.15,34.925 85.15,35.8 85.525,36.175 85.573,36.127 v1(85.729,36.127) ; v1(88.3,38.425) 88.35,38.475 88.45,38.475 88.65,38.275 U28.29@90.5,38.275 ; v1(88.6,37.125) 88.75,37.275 U28.27@90.5,37.275 ; v1(88.65,39.575) 88.65,39.6 88.825,39.775 U28.32@90.5,39.775 ; v1(88.675,41.075) 88.975,40.775 U28.34@90.5,40.775 ; v1@83.352,37.775 83.375,37.775 83.425,37.825 83.402,37.825 v1@83.352,37.775
  Top Layer w0.381: v1(15.725,14.45) 15.75,14.425 C50.2@16.75,14.425 ; v1(16.525,7.8) 17.15,7.175 C119.2@17.15,7 ; v1(16.95,2.575) C118.2@17.1,2.575 ; v1(17.075,1.85) 17.1,1.825 v1(18.4,1.825) 18.375,1.85 v1(18.375,2.625) 18.325,2.575 C118.2@17.1,2.575 ; v1@17.4,29.95 17.475,30.025 R34.2@17.475,30.7 ; C118.2@17.725,2.15 17.525,2.15 C118.2@17.1,2.575 ; Q1.2@22.075,28.475 22.1,28.475 v1(22.175,28.4) ; U39.2@23.875,3.325 24.9,3.325 v1(24.95,3.375) ; U7.2@23.875,10.8 25.05,10.8 v1(25.1,10.85) ; R14.1@27.725,5.275 28.775,5.275 v1(28.8,5.3) ; R80.1@27.725,12.575 v1(28.525,12.575) ; R23.2@29.325,34.025 C39.2@29.325,35.825 ; C57.2@30.85,18.225 33.9,18.225 ; v1(31.375,12.325) 32.6,12.325 v1(32.675,12.4) 32.675,12.575 v1(32.05,13.2) v1(31.075,13.2) 31.525,12.75 C14.2@31.9,12.75 ; v1(31.75,23.3) 32.075,22.975 C60.1@33,22.975 ; v1(34.475,17.75) 34,18.225 33.9,18.225 ; C36.2@34.875,18.875 34.55,18.875 ; R45.1@36.25,24.1 v1(36.25,24.875) ; U18.3@62.325,19.525 62.8,19.05 v1(62.8,18.775) ; C74.2@63.3,22.35 63.3,23.15 63.375,23.225 v1(63.375,23.25) ; v1(65.1,72.225) 65.125,72.225 65.1,72.25 C18.2@65.1,73.225 ; v1@65.65,13.9 66,13.9 66.425,14.325 U24.4@66.95,14.325 ; U19.3@67.775,22.175 v1(68.675,22.175) ; U17.4@70.25,20.95 71.125,21.825 C80.2@71.125,22.25 71.825,22.25 72.125,22.55 v1(72.15,22.55) ; v1(79.275,23.475) 79.3,23.45 U35.10@80.425,23.45 ; U32.7@85.595,2.5 85.595,4.22 v1(85.725,4.35) ; U35.1@86.275,23.45 86.65,23.45 87.3,24.1 v1(87.325,24.1) ; C111.2@88.675,17.6 89.475,17.6 v1(89.525,17.65) ; v1(92.075,23.525) 92.05,23.5 92.1,23.45 U30.10@93.4,23.45 ; U32.14@94.485,2.5 94.485,2.065 U32.14@94.65,1.9 ; U30.1@99.25,23.45 100.125,23.45 100.225,23.55 100.25,23.55 v1(100.275,23.525) ; C101.2@101.15,18.85 101.15,19.675 101.3,19.825 v1(101.3,19.925) ; v1(114.45,2.525) 114.475,2.5 U31.14@114.51,2.5 ; P3.10@119.375,30.25 121.5,30.25 v1(121.8,30.55) 121.6,30.75 P3.11@119.375,30.75 ; 33.9,18.225 33.55,18.575 33.85,18.875 34.55,18.875 ; 33.9,18.225 34.55,18.875
  Top Layer w0.508: v1@59.95,5.7 59.975,5.7 60,5.725 U21.2@60.675,5.725 ; v1(65,4.95) 65.1,5.05 U22.3@66.05,5.05 ; v1(66.525,11.95) 66.525,11.9 66.6,11.975 C93.2@67.525,11.975 ; v1@66.675,8.75 67.075,8.75 67.7,8.125 C88.2@67.7,7.775 ; U26.7@85.595,62.025 85.625,62.025 v1(85.7,62.1) ; U25.10@86.275,52.225 87.275,52.225 v1(87.375,52.325) ; C110.2@92,59.15 92.5,59.15 v1(92.85,59.5) ; U29.1@93.4,52.225 93.4,50.55 v1(93.825,50.125) v1@93.8,50.125 ; C79.2@95.725,73.425 95.725,74.15 95.7,74.175 v1@95.725,74.175 ; U29.10@99.25,52.225 99.275,52.25 v1(99.275,53.7) ; U27.14@114.51,62.025 114.75,61.785 v1(114.75,61.5)
  Top Layer w0.762: v1(6.475,60.6) 6.5,60.575 P1.2@6.5,58 ; P2.2@6.5,38 v1(8.925,38) ; P2.2@6.5,46 9.4,46 v1(9.425,45.975) ; P1.2@6.5,66 8.75,66 v1(8.825,65.925) ; v1(11,58.375) 11.375,58 P1.2@14.5,58 ; v1(11.4,38) P2.2@14.5,38 ; v1(11.5,45.85) 11.65,46 P2.2@14.5,46 ; v1(11.775,66) P1.2@14.5,66 ; v1(16.35,72.975) 16.4,72.975 16.55,72.825 R53.2@17.275,72.825 ; Q2.2@21.95,70.3 21.95,69.2 22,69.15 v1(22.125,69.15) ; v1(29.175,53.375) 29.15,53.4 29.325,53.575 R3.2@29.325,54.4 C6.2@29.325,56.2 ; v1(34.325,70.3) 34.6,70.025 C7.2@34.6,69.05 34.575,69.025 R9.2@34.575,67.375 ; R27.2@34.55,47.075 C41.2@34.55,48.7 34.55,50.225 v1(34.6,50.275) ; C67.2@38.575,11.75 38.575,12.3 C66.2@39.275,13 ; v1@39.675,48.725 39.675,48.7 40.3,48.075 C40.1@40.75,48.075 ; C12.1@40.675,67.8 42.45,66.025 42.45,65.75 43.075,65.125 C29.1@43.925,65.125 43.45,64.65 C32.2@42.375,64.65 ; U12.3@41.15,18.025 41.8,18.675 C62.2@44.7,18.675 ; v1(41.4,24.5) 41.425,24.525 C64.1@42.325,24.525 42.4,24.45 R47.1@42.4,23.5 41.7,22.8 C56.2@41.7,22.05 ; C45.2@42.341,44.509 42.882,45.05 C28.2@45.9,45.05 ; 44.375,65.175 44.4,65.15 C1.2@45.9,65.15 ; U13.4@45.3,7.725 45.3,7.175 v1(46.2,6.275) ; C63.2@47.9,25.75 49.35,24.3 R43.1@49.35,23.5 ; v1(48.275,5.45) 48.275,5.425 48.3,5.4 C75.2@48.3,4.05 ; C37.2@50.125,45.05 v1(50.125,45.95) ; C4.2@50.125,65.15 50.125,65.95 50.175,66 v1(50.175,66.025) ; v1(50.268,72.525) 50.268,72.593 50.625,72.95 C20.2@50.625,73.325 ; C19.2@53.525,71.65 54.9,73.025 SP1.2@56.575,73.025 ; v1@53.928,40.627 54.1,40.455 C383.1@54.1,39.8 ; v1@54,66.975 54.025,67 C122.2@54.025,67.725 ; C382.1@55.75,42.325 56.175,42.325 56.551,41.949 v1(56.599,41.949) ; U15.4@56.65,37.24 56.95,36.94 v1(56.95,36.325) ; v1(57.475,62.8) 57.6,62.675 U5.4@59.115,62.675 ; v1(58.975,44.075) 59.2,43.85 C31.2@59.2,42.825 ; 59.175,66.6 60.15,67.575 SP2.2@60.975,67.575 ; v1(59.775,3.85) 59.925,3.7 C87.2@60.825,3.7 ; C30.1@61.15,54 62.675,54 C13.1@63.375,54.7 64.225,55.55 C33.2@64.225,56.025 65,56.8 v1(65.05,56.8) ; C46.2@62.275,34.725 v1(63.15,34.675) C44.1@63.9,35.425 ; C385.1@62.75,64.75 64.225,64.75 65.425,63.55 C384.1@65.425,62.975 ; C10.2@63.2,48.65 63.2,48.05 C8.1@63.95,47.3 64.075,47.175 v1(64.075,46.075) ; C38.2@63.775,42.75 63.775,43.4 63.85,43.475 v1@63.85,43.5 ; C9.2@64.575,60.925 65.575,60.925 C11.2@65.975,60.525 65.975,61.775 v1(66.4,62.2) ; v1(65.975,29.15) 66.1,29.15 66.65,28.6 R78.1@66.7,28.6 ; v1(67.15,46.175) 68.025,47.05 R10.1@68.275,47.05 ; C47.1@67.7,41.975 68.5,41.175 v1(68.5,41.075) ; C34.2@67.725,35.775 67.725,34.6 67.95,34.375 C25.1@68.525,34.375 ; C22.1@67.975,54.875 70.9,54.875 v1(71.2,55.175) ; v1(68.275,16.325) 68.275,17.825 C83.2@68.65,18.2 ; U33.2@68.9,30.525 68.9,31.275 69.7,32.075 v1(69.7,32.05) ; C78.2@69.425,60.4 69.425,60.593 70.05,61.218 v1(70.05,62.825) 71.4,62.825 R61.1@72,62.225 ; C120.2@69.475,68.05 69.475,67.575 v1(70.125,66.925) ; v1(69.975,26.5) 70.05,26.425 C49.2@71.2,26.425 ; U10.0@70.4,38.725 v1(70.45,38.675) ; v1(72.275,43.05) 72.55,42.775 C48.1@72.55,41.4 ; R29.1@72.7,33.8 72.7,32.725 v1(72.975,32.45) 73.725,31.7 D12.1@75.975,31.7 77.815,31.7 D11.2@77.825,31.69 ; U16.2@73.025,57.4 73.025,58.625 v1(73.075,58.675) ; v1(74.875,52.41) 74.91,52.375 v1(76.725,52.375) ; C94.2@75.15,73.325 75.15,74.575 v1(75.175,74.6) ; v1(77.575,38.9) 77.625,38.85 C107.2@78.575,38.85 ; C86.2@78.875,47.9 78.875,46.85 80.35,45.375 C106.2@80.475,45.375 ; C96.2@79.3,56.8 79.3,55.25 v1(79.35,55.2) ; 80.175,52.475 v1(80.175,54.25) ; C100.2@94.225,41 C104.2@94.225,39.708 C103.2@94.225,38.742 C99.2@94.225,37.775 95.5,37.775 95.525,37.75 95.5,37.725 v1(95.425,37.725)
  Mid-Layer 1 w0.762: U11.0@47.55,73.825 48.85,72.525 v1(50.268,72.525) ; v1(68.5,41.075) 70.05,39.525 70.05,39.075
  other v1: 12.475,1.7 94.475,1.8 7.725,2.15 105.62,2.5 55.475,3.05 56.35,3.125 14.2,3.425 55.5,4.15 56.425,4.2 33.45,5.55 59.875,5.7 31.7,6.175 32.625,6.175 38.075,6.375 39.825,7.275 66.725,8.65 17.75,9.15 4.375,9.775 17,9.95 18.275,10 57.125,11.725 46.15,11.825 38.6,12.55 3.975,12.575 46.175,12.775 53.625,12.825 46.175,13.575 65.7,13.825 59.525,14.05 34.925,16.95 35.325,17.775 5.425,18.125 24.425,18.675 42.275,18.675 53.075,22.25 5.125,22.4 48.4,24.775 29.6,24.9 55.4,25 54.4,25.025 30.375,25.35 48.475,25.675 29.675,26.4 30.4,26.5 48.425,26.575 55.5,26.675 54.275,26.875 124.975,27 126.05,27.05 13.975,27.75 11.175,28.025 6.35,28.775 124.975,29 126,29 17.425,29.875 126.125,30.95 42.05,31.05 95.5,32.475 96.35,32.475 43.9,33.05 12.7,33.075 5.975,33.425 9.325,33.45 95.55,34.125 96.4,34.175 67.675,34.7 29.3,35.825 83.5,37.7 53.875,40.675 76.425,41.535 74.45,41.6 6.225,42.125 78.125,42.925 79.925,42.925 74.125,43.04 63.825,43.675 85.075,44.325 44.975,45.05 78.425,47.475 79.475,47.9 39.6,48.775 78.4,48.775 79.375,48.8 14.925,50.125 17.3,50.425 11.225,50.525 7,50.55 26.25,51.05 22.825,51.425 66,51.65 75.75,52.425 8.475,52.85 10.95,53 15.325,53 5.825,53.05 62.425,54 94.485,62.025 105.62,62.025 64.325,64.85 44.975,65.175 42.9,65.4 67.35,65.45 57.6,65.825 58.925,66.05 42.175,66.275 57.075,66.75 65.725,66.75 58.375,66.775 54,66.875 62.625,71.7 61.425,71.725 54,71.975 95.675,74.275
  other v2: 118.225,22.525 119.225,24.15 119.9,51.65 118.25,52.45 116.375,52.925
DQA1: P3.28 U26.9 U27.12 U31.16 U32.19 | length 110.3
  Top Layer w0.254: U32.19@89.405,13.8 89.405,12.47 v1(90.7,11.175) ; v1@113.1,39.225 113.125,39.25 113.15,39.25 P3.28@119.375,39.25
  Bottom Layer w0.254: v1(88.125,62.4) 88.4,62.4 90.95,64.95 110.075,64.95 112,63.025 v1(112,62) 111.975,61.975 111.975,60.425 112.879,59.521 112.879,39.079 v1(112.875,39.075) ; v1(90.7,11.175) 91.425,10.45 111.75,10.45 113.275,11.975 113.275,13.6 v1(113.225,13.65) 113.225,13.775 112.75,14.25 v1@112.75,39.075
DQA2: P3.29 U26.10 U27.11 U31.17 U32.18 | length 105.5
  Top Layer w0.254: U32.18@90.675,13.8 90.675,12.475 91.8,11.35 v1(91.8,11.4) ; v1@112.35,40.275 112.975,40.275 113.5,39.75 P3.29@119.375,39.75
  Bottom Layer w0.254: v1(89.375,62.425) 91.2,64.25 109.4,64.25 110.725,62.925 v1(110.725,62.45) 110.725,60.975 112.225,59.475 v1(112.225,40.175) 112.225,13.625 v1(111.95,13.35) 111.95,11.75 111.975,11.725 111.15,10.9 92.3,10.9 v1(91.8,11.4)
DQA3: P3.30 U26.11 U27.10 U31.18 U32.17 | length 100.5
  Top Layer w0.254: U26.11@90.675,62.025 v1(90.675,62.375) ; U32.17@91.945,13.8 91.945,12.73 93.15,11.525 v1(93.175,11.525) ; v1(111.6,41.175) 111.625,41.15 113.025,41.15 113.925,40.25 P3.30@119.375,40.25
  Bottom Layer w0.254: v1(90.675,62.375) 92.025,63.725 108.15,63.725 v1(109.45,62.425) 109.45,61.475 111.6,59.325 v1(111.6,41.175) 111.6,15.386 110.725,14.511 v1(110.725,13.425) 110.7,13.4 110.7,12.2 109.95,11.45 93.25,11.45 v1(93.175,11.525)
DQA4: P3.31 U26.12 U27.9 U31.19 U32.16 | length 95.3
  Top Layer w0.254: U32.16@93.215,13.8 93.215,12.51 93.625,12.1 93.65,12.125 v1(94.4,12.125) ; v1(110.875,42.15) 110.9,42.125 113.05,42.125 114.425,40.75 P3.31@119.375,40.75
  Bottom Layer w0.254: v1(91.95,62.375) 92.775,63.2 107.3,63.2 v1(108.15,62.35) 108.15,61.925 110.857,59.218 110.857,15.807 109.55,14.5 109.55,13.775 v1(109.425,13.65) 109.425,12.55 109,12.125 v1(94.4,12.125)
DQA5: P3.35 U26.16 U27.19 U31.9 U32.12 | length 120.9
  Top Layer w0.254: U32.12@91.945,2.5 91.945,3.55 92.545,4.15 v1(93.5,4.15) ; v1(107.6,15.625) 107.55,15.575 107.55,4.325 108.15,3.725 v1(108.15,2.675) ; v1(108.075,45.175) 108.05,45.2 114,45.2 116.45,42.75 P3.35@119.375,42.75 ; v1(108.075,60.425) 108.075,60.45 107.55,60.975 107.55,63.8 109.4,65.65 v1(109.4,73.1)
  Bottom Layer w0.254: v1(93.25,72.9) 93.25,72.5 93.857,71.893 109.143,71.893 109.45,72.2 109.45,73.125 109.4,73.075 v1@109.275,73.075 ; v1@93.525,4.075 107.65,4.075 108.15,3.575 v1(108.15,2.675) ; v1(107.6,15.625) 108.075,16.1 v1(108.075,45.175) v1(108.075,60.425)
DQA6: P3.34 U26.17 U27.18 U31.10 U32.11 | length 126.6
  Top Layer w0.254: U32.11@90.675,2.5 90.675,3.875 91.75,4.95 94.45,4.95 v1(94.525,5.025) ; v1(108.85,44.5) 113.8,44.5 116.05,42.25 P3.34@119.375,42.25 ; v1(108.875,59.725) 108.8,59.8 108.8,63.9 109.875,64.975 109.875,71.15 110.7,71.975 v1(110.7,73.15) ; v1(108.925,15.8) 108.775,15.65 108.775,4.7 109.43,4.045 U31.10@109.43,2.5
  Bottom Layer w0.254: v1(91.925,72.825) 91.925,72.65 93.063,71.512 110.537,71.512 110.75,71.725 110.75,73.1 v1(110.7,73.15) ; v1@94.575,5.075 95.1,4.55 108.75,4.55 109.375,3.925 109.375,2.7 v1(109.425,2.65) ; v1(108.925,15.8) 108.875,15.85 108.875,57.45 108.925,57.5 v1@108.925,59.725
DQA7: P3.33 U26.18 U27.17 U31.11 U32.10 | length 132.3
  Top Layer w0.254: U32.10@89.405,2.5 89.405,4.375 90.655,5.625 95.25,5.625 v1(95.55,5.325) ; v1(90.675,72.9) U26.18@90.675,73.325 ; v1(109.5,43.725) 109.5,43.75 113.575,43.75 115.575,41.75 P3.33@119.375,41.75 ; v1(109.725,16.35) 109.725,15.55 110.075,15.2 110.075,4.625 110.7,4 v1(110.7,2.775) ; v1(109.975,59.025) 110.05,59.1 110.05,63.825 110.425,64.2 110.425,70.875 111.95,72.4 v1(111.95,73.125)
  Bottom Layer w0.254: v1(90.675,72.9) 90.675,72.725 92.269,71.131 111.306,71.131 111.875,71.7 v1@111.875,73.1 ; v1(95.55,5.325) 95.825,5.05 109.675,5.05 110.725,4 110.725,2.825 110.7,2.8 v1(110.7,2.775) ; v1(109.725,16.35) 109.5,16.575 v1(109.5,43.725) 109.5,57.464 109.475,57.489 109.475,58.525 v1(109.975,59.025)